# EAGLE board SparkFun_AS3935_Lightning_Detector-Panel (EAGLE 9.4.0), part 1 of 4
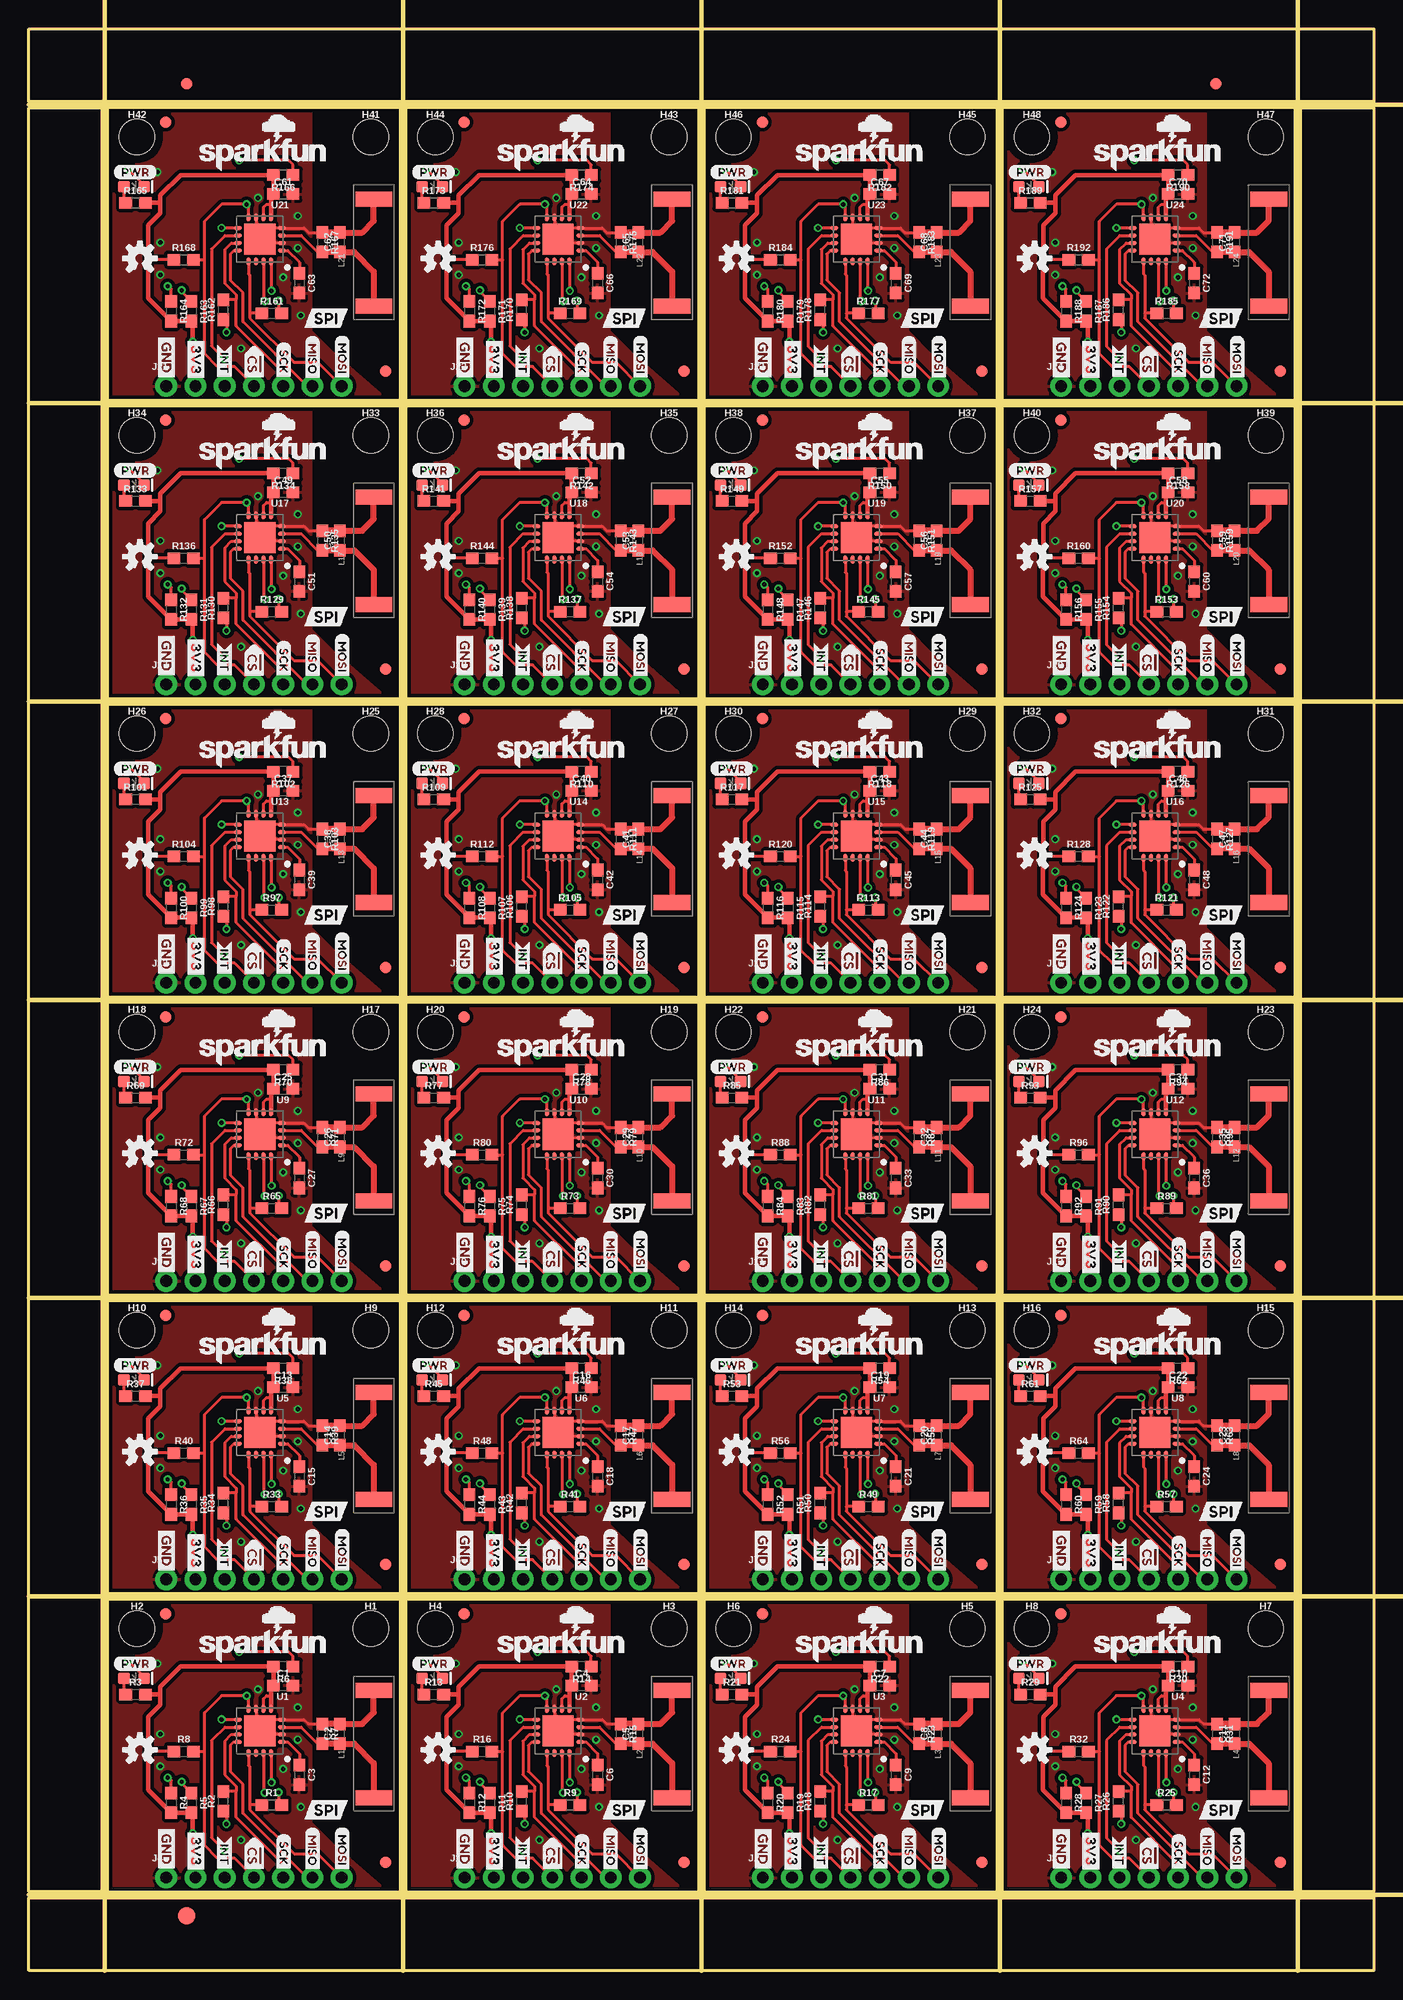
[diagram p0: board, top side]
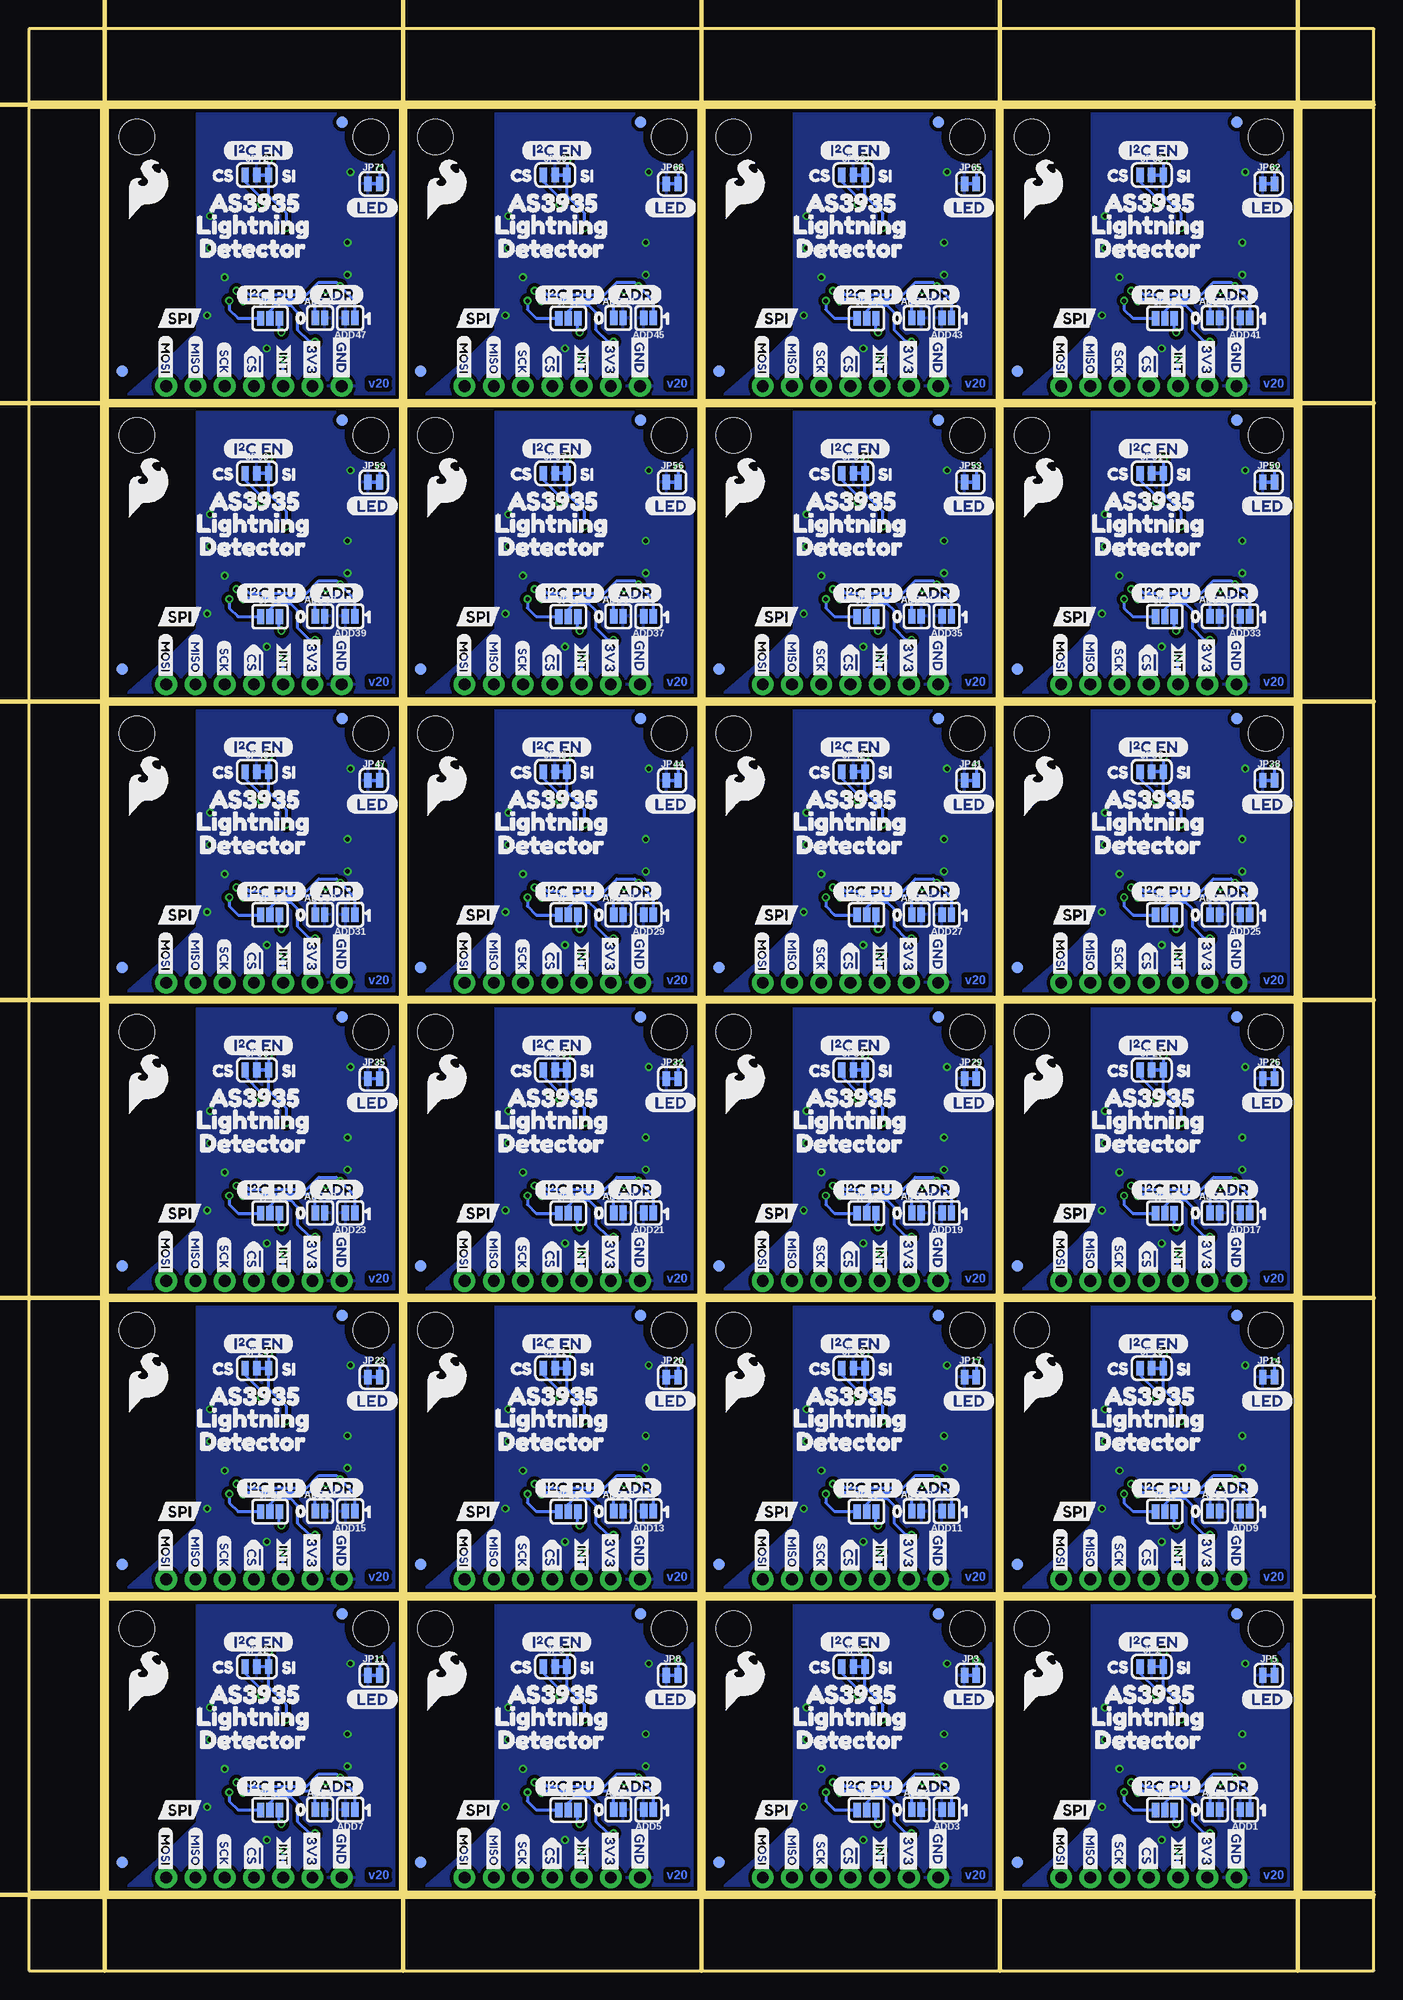
[diagram p1: board, bottom side, seen from below]

Size 116.84 x 168.66 mm. Coordinates in mm from the lower left corner, seen from the top.
Outline: 6.86,6.86 32.26,6.86 32.26,32.26 6.86,32.26 6.86,6.86
Outline: 32.77,6.86 58.17,6.86 58.17,32.26 32.77,32.26 32.77,6.86
Outline: 58.67,6.86 84.07,6.86 84.07,32.26 58.67,32.26 58.67,6.86
Outline: 84.58,6.86 109.98,6.86 109.98,32.26 84.58,32.26 84.58,6.86
Outline: 6.86,32.77 32.26,32.77 32.26,58.17 6.86,58.17 6.86,32.77
Outline: 32.77,32.77 58.17,32.77 58.17,58.17 32.77,58.17 32.77,32.77
Outline: 58.67,32.77 84.07,32.77 84.07,58.17 58.67,58.17 58.67,32.77
Outline: 84.58,32.77 109.98,32.77 109.98,58.17 84.58,58.17 84.58,32.77
Outline: 6.86,58.67 32.26,58.67 32.26,84.07 6.86,84.07 6.86,58.67
Outline: 32.77,58.67 58.17,58.67 58.17,84.07 32.77,84.07 32.77,58.67
Outline: 58.67,58.67 84.07,58.67 84.07,84.07 58.67,84.07 58.67,58.67
Outline: 84.58,58.67 109.98,58.67 109.98,84.07 84.58,84.07 84.58,58.67
Outline: 6.86,84.58 32.26,84.58 32.26,109.98 6.86,109.98 6.86,84.58
Outline: 32.77,84.58 58.17,84.58 58.17,109.98 32.77,109.98 32.77,84.58
Outline: 58.67,84.58 84.07,84.58 84.07,109.98 58.67,109.98 58.67,84.58
Outline: 84.58,84.58 109.98,84.58 109.98,109.98 84.58,109.98 84.58,84.58
Outline: 6.86,110.49 32.26,110.49 32.26,135.89 6.86,135.89 6.86,110.49
Outline: 32.77,110.49 58.17,110.49 58.17,135.89 32.77,135.89 32.77,110.49
Outline: 58.67,110.49 84.07,110.49 84.07,135.89 58.67,135.89 58.67,110.49
Outline: 84.58,110.49 109.98,110.49 109.98,135.89 84.58,135.89 84.58,110.49
Outline: 6.86,136.4 32.26,136.4 32.26,161.8 6.86,161.8 6.86,136.4
Outline: 32.77,136.4 58.17,136.4 58.17,161.8 32.77,161.8 32.77,136.4
Outline: 58.67,136.4 84.07,136.4 84.07,161.8 58.67,161.8 58.67,136.4
Outline: 84.58,136.4 109.98,136.4 109.98,161.8 84.58,161.8 84.58,136.4
Outline: 0,6.35 116.84,6.35 116.84,0 0,0 0,6.35
Outline: 110.49,161.8 116.84,161.8 116.84,6.86 110.49,6.86 110.49,161.8
Outline: 0,168.66 116.84,168.66 116.84,162.31 0,162.31 0,168.66
Outline: 0,161.8 6.35,161.8 6.35,6.86 0,6.86 0,161.8
Copper layers (1*16): Top 0.035mm / dielectric 1.5mm / Bottom 0.035mm
Design rules "SparkFun-2-layer-PCBWay-LIMIT": minimum track width 6mil, minimum drill 0.3mm, track to track 6mil, track to pad 6mil, pad to pad 6mil, via to via 6mil, smd to smd 6mil, copper to edge 6mil, drill to drill 6mil, minimum pad ring 6mil, minimum via ring 6mil, stop-mask expansion 4mil, vias tented up to drill 25mil, thermal gap 10mil
Milling: 12 lines

## Footprints (pad centres in the part's own frame; a part is rotated, then mirrored left to right if it is on the bottom)
SMT-JUMPER_2_NO_SILK = smd 0.635 x 1.27: 1 -0.406,0; 2 0.406,0
0603 = smd 1.1 x 1: 1 -0.85,0; 2 0.85,0
LED-0603 = smd 1 x 1: A -0.877,0; C 0.877,0
FIDUCIAL-1X2 = smd 1 x 1: 1 0,0
FIDUCIAL-1.5X3 = smd 1.5 x 1.5: 1 0,0
STAND-OFF-TIGHT = hole 3.048: 0,0
1X07_NO_SILK = drill 1.016 pad 1.88: 1 0,0; 2 2.54,0; 3 5.08,0; 4 7.62,0; 5 10.16,0; 6 12.7,0; 7 15.24,0
SMT-JUMPER_3_1-NC_TRACE_SILK = smd 0.635 x 1.27: 1 -1.016,0; 2 0,0; 3 1.016,0
SMT-JUMPER_3_NO_SILK = smd 0.635 x 1.27: 1 -0.813,0; 2 0,0; 3 0.813,0
SMT-JUMPER_2_NC_TRACE_SILK = smd 0.635 x 1.27: 1 -0.508,0; 2 0.508,0
MA5532-AE = smd 1.3 x 3.2: 1 -4.65,0; 2 4.65,0
16LD_MLPQ = smd 0.7 x 0.35: 1 -1.919,0.968; 2 -1.919,0.318; 3 -1.919,-0.332; 4 -1.919,-0.982; 9 1.908,-0.982; 10 1.908,-0.332; 11 1.908,0.318; 12 1.908,0.968 | smd 0.35 x 0.7: 5 -0.982,-1.917; 6 -0.332,-1.917; 7 0.318,-1.917; 8 0.968,-1.917; 13 0.968,1.907; 14 0.318,1.907; 15 -0.332,1.907; 16 -0.982,1.907 | smd 2.7 x 2.7: 17 -0.007,-0.007

## Placement (x,y rotation side)
ADD0  JUMPER-SMT_2_NO_SILK  [SMT-JUMPER_2_NO_SILK]  13.82,14 0 bottom
ADD1  JUMPER-SMT_2_NO_SILK  [SMT-JUMPER_2_NO_SILK]  11.2,14 180 bottom
ADD2  JUMPER-SMT_2_NO_SILK  [SMT-JUMPER_2_NO_SILK]  39.73,14 0 bottom
ADD3  JUMPER-SMT_2_NO_SILK  [SMT-JUMPER_2_NO_SILK]  37.11,14 180 bottom
ADD4  JUMPER-SMT_2_NO_SILK  [SMT-JUMPER_2_NO_SILK]  65.63,14 0 bottom
ADD5  JUMPER-SMT_2_NO_SILK  [SMT-JUMPER_2_NO_SILK]  63.02,14 180 bottom
ADD6  JUMPER-SMT_2_NO_SILK  [SMT-JUMPER_2_NO_SILK]  91.54,14 0 bottom
ADD7  JUMPER-SMT_2_NO_SILK  [SMT-JUMPER_2_NO_SILK]  88.93,14 180 bottom
ADD8  JUMPER-SMT_2_NO_SILK  [SMT-JUMPER_2_NO_SILK]  13.82,39.9 0 bottom
ADD9  JUMPER-SMT_2_NO_SILK  [SMT-JUMPER_2_NO_SILK]  11.2,39.9 180 bottom
ADD10  JUMPER-SMT_2_NO_SILK  [SMT-JUMPER_2_NO_SILK]  39.73,39.9 0 bottom
ADD11  JUMPER-SMT_2_NO_SILK  [SMT-JUMPER_2_NO_SILK]  37.11,39.9 180 bottom
ADD12  JUMPER-SMT_2_NO_SILK  [SMT-JUMPER_2_NO_SILK]  65.63,39.9 0 bottom
ADD13  JUMPER-SMT_2_NO_SILK  [SMT-JUMPER_2_NO_SILK]  63.02,39.9 180 bottom
ADD14  JUMPER-SMT_2_NO_SILK  [SMT-JUMPER_2_NO_SILK]  91.54,39.9 0 bottom
ADD15  JUMPER-SMT_2_NO_SILK  [SMT-JUMPER_2_NO_SILK]  88.93,39.9 180 bottom
ADD16  JUMPER-SMT_2_NO_SILK  [SMT-JUMPER_2_NO_SILK]  13.82,65.81 0 bottom
ADD17  JUMPER-SMT_2_NO_SILK  [SMT-JUMPER_2_NO_SILK]  11.2,65.81 180 bottom
ADD18  JUMPER-SMT_2_NO_SILK  [SMT-JUMPER_2_NO_SILK]  39.73,65.81 0 bottom
ADD19  JUMPER-SMT_2_NO_SILK  [SMT-JUMPER_2_NO_SILK]  37.11,65.81 180 bottom
ADD20  JUMPER-SMT_2_NO_SILK  [SMT-JUMPER_2_NO_SILK]  65.63,65.81 0 bottom
ADD21  JUMPER-SMT_2_NO_SILK  [SMT-JUMPER_2_NO_SILK]  63.02,65.81 180 bottom
ADD22  JUMPER-SMT_2_NO_SILK  [SMT-JUMPER_2_NO_SILK]  91.54,65.81 0 bottom
ADD23  JUMPER-SMT_2_NO_SILK  [SMT-JUMPER_2_NO_SILK]  88.93,65.81 180 bottom
ADD24  JUMPER-SMT_2_NO_SILK  [SMT-JUMPER_2_NO_SILK]  13.82,91.72 0 bottom
ADD25  JUMPER-SMT_2_NO_SILK  [SMT-JUMPER_2_NO_SILK]  11.2,91.72 180 bottom
ADD26  JUMPER-SMT_2_NO_SILK  [SMT-JUMPER_2_NO_SILK]  39.73,91.72 0 bottom
ADD27  JUMPER-SMT_2_NO_SILK  [SMT-JUMPER_2_NO_SILK]  37.11,91.72 180 bottom
ADD28  JUMPER-SMT_2_NO_SILK  [SMT-JUMPER_2_NO_SILK]  65.63,91.72 0 bottom
ADD29  JUMPER-SMT_2_NO_SILK  [SMT-JUMPER_2_NO_SILK]  63.02,91.72 180 bottom
ADD30  JUMPER-SMT_2_NO_SILK  [SMT-JUMPER_2_NO_SILK]  91.54,91.72 0 bottom
ADD31  JUMPER-SMT_2_NO_SILK  [SMT-JUMPER_2_NO_SILK]  88.93,91.72 180 bottom
ADD32  JUMPER-SMT_2_NO_SILK  [SMT-JUMPER_2_NO_SILK]  13.82,117.63 0 bottom
ADD33  JUMPER-SMT_2_NO_SILK  [SMT-JUMPER_2_NO_SILK]  11.2,117.63 180 bottom
ADD34  JUMPER-SMT_2_NO_SILK  [SMT-JUMPER_2_NO_SILK]  39.73,117.63 0 bottom
ADD35  JUMPER-SMT_2_NO_SILK  [SMT-JUMPER_2_NO_SILK]  37.11,117.63 180 bottom
ADD36  JUMPER-SMT_2_NO_SILK  [SMT-JUMPER_2_NO_SILK]  65.63,117.63 0 bottom
ADD37  JUMPER-SMT_2_NO_SILK  [SMT-JUMPER_2_NO_SILK]  63.02,117.63 180 bottom
ADD38  JUMPER-SMT_2_NO_SILK  [SMT-JUMPER_2_NO_SILK]  91.54,117.63 0 bottom
ADD39  JUMPER-SMT_2_NO_SILK  [SMT-JUMPER_2_NO_SILK]  88.93,117.63 180 bottom
ADD40  JUMPER-SMT_2_NO_SILK  [SMT-JUMPER_2_NO_SILK]  13.82,143.54 0 bottom
ADD41  JUMPER-SMT_2_NO_SILK  [SMT-JUMPER_2_NO_SILK]  11.2,143.54 180 bottom
ADD42  JUMPER-SMT_2_NO_SILK  [SMT-JUMPER_2_NO_SILK]  39.73,143.54 0 bottom
ADD43  JUMPER-SMT_2_NO_SILK  [SMT-JUMPER_2_NO_SILK]  37.11,143.54 180 bottom
ADD44  JUMPER-SMT_2_NO_SILK  [SMT-JUMPER_2_NO_SILK]  65.63,143.54 0 bottom
ADD45  JUMPER-SMT_2_NO_SILK  [SMT-JUMPER_2_NO_SILK]  63.02,143.54 180 bottom
ADD46  JUMPER-SMT_2_NO_SILK  [SMT-JUMPER_2_NO_SILK]  91.54,143.54 0 bottom
ADD47  JUMPER-SMT_2_NO_SILK  [SMT-JUMPER_2_NO_SILK]  88.93,143.54 180 bottom
C1  1.0uF  [0603]  22.1,24.77 0 top
C2  1nF  [0603]  27.03,20.57 90 top
C3  10uF  [0603]  23.5,17.02 270 top
C4  1.0uF  [0603]  48.01,24.77 0 top
C5  1nF  [0603]  52.93,20.57 90 top
C6  10uF  [0603]  49.4,17.02 270 top
C7  1.0uF  [0603]  73.91,24.77 0 top
C8  1nF  [0603]  78.84,20.57 90 top
C9  10uF  [0603]  75.31,17.02 270 top
C10  1.0uF  [0603]  99.82,24.77 0 top
C11  1nF  [0603]  104.75,20.57 90 top
C12  10uF  [0603]  101.22,17.02 270 top
C13  1.0uF  [0603]  22.1,50.67 0 top
C14  1nF  [0603]  27.03,46.48 90 top
C15  10uF  [0603]  23.5,42.93 270 top
C16  1.0uF  [0603]  48.01,50.67 0 top
C17  1nF  [0603]  52.93,46.48 90 top
C18  10uF  [0603]  49.4,42.93 270 top
C19  1.0uF  [0603]  73.91,50.67 0 top
C20  1nF  [0603]  78.84,46.48 90 top
C21  10uF  [0603]  75.31,42.93 270 top
C22  1.0uF  [0603]  99.82,50.67 0 top
C23  1nF  [0603]  104.75,46.48 90 top
C24  10uF  [0603]  101.22,42.93 270 top
C25  1.0uF  [0603]  22.1,76.58 0 top
C26  1nF  [0603]  27.03,72.39 90 top
C27  10uF  [0603]  23.5,68.83 270 top
C28  1.0uF  [0603]  48.01,76.58 0 top
C29  1nF  [0603]  52.93,72.39 90 top
C30  10uF  [0603]  49.4,68.83 270 top
C31  1.0uF  [0603]  73.91,76.58 0 top
C32  1nF  [0603]  78.84,72.39 90 top
C33  10uF  [0603]  75.31,68.83 270 top
C34  1.0uF  [0603]  99.82,76.58 0 top
C35  1nF  [0603]  104.75,72.39 90 top
C36  10uF  [0603]  101.22,68.83 270 top
C37  1.0uF  [0603]  22.1,102.49 0 top
C38  1nF  [0603]  27.03,98.3 90 top
C39  10uF  [0603]  23.5,94.74 270 top
C40  1.0uF  [0603]  48.01,102.49 0 top
C41  1nF  [0603]  52.93,98.3 90 top
C42  10uF  [0603]  49.4,94.74 270 top
C43  1.0uF  [0603]  73.91,102.49 0 top
C44  1nF  [0603]  78.84,98.3 90 top
C45  10uF  [0603]  75.31,94.74 270 top
C46  1.0uF  [0603]  99.82,102.49 0 top
C47  1nF  [0603]  104.75,98.3 90 top
C48  10uF  [0603]  101.22,94.74 270 top
C49  1.0uF  [0603]  22.1,128.4 0 top
C50  1nF  [0603]  27.03,124.21 90 top
C51  10uF  [0603]  23.5,120.65 270 top
C52  1.0uF  [0603]  48.01,128.4 0 top
C53  1nF  [0603]  52.93,124.21 90 top
C54  10uF  [0603]  49.4,120.65 270 top
C55  1.0uF  [0603]  73.91,128.4 0 top
C56  1nF  [0603]  78.84,124.21 90 top
C57  10uF  [0603]  75.31,120.65 270 top
C58  1.0uF  [0603]  99.82,128.4 0 top
C59  1nF  [0603]  104.75,124.21 90 top
C60  10uF  [0603]  101.22,120.65 270 top
C61  1.0uF  [0603]  22.1,154.31 0 top
C62  1nF  [0603]  27.03,150.11 90 top
C63  10uF  [0603]  23.5,146.56 270 top
C64  1.0uF  [0603]  48.01,154.31 0 top
C65  1nF  [0603]  52.93,150.11 90 top
C66  10uF  [0603]  49.4,146.56 270 top
C67  1.0uF  [0603]  73.91,154.31 0 top
C68  1nF  [0603]  78.84,150.11 90 top
C69  10uF  [0603]  75.31,146.56 270 top
C70  1.0uF  [0603]  99.82,154.31 0 top
C71  1nF  [0603]  104.75,150.11 90 top
C72  10uF  [0603]  101.22,146.56 270 top
D1  RED  [LED-0603]  9.14,25.4 0 top
D2  RED  [LED-0603]  35.05,25.4 0 top
D3  RED  [LED-0603]  60.96,25.4 0 top
D4  RED  [LED-0603]  86.87,25.4 0 top
D5  RED  [LED-0603]  9.14,51.31 0 top
D6  RED  [LED-0603]  35.05,51.31 0 top
D7  RED  [LED-0603]  60.96,51.31 0 top
D8  RED  [LED-0603]  86.87,51.31 0 top
D9  RED  [LED-0603]  9.14,77.22 0 top
D10  RED  [LED-0603]  35.05,77.22 0 top
D11  RED  [LED-0603]  60.96,77.22 0 top
D12  RED  [LED-0603]  86.87,77.22 0 top
D13  RED  [LED-0603]  9.14,103.12 0 top
D14  RED  [LED-0603]  35.05,103.12 0 top
D15  RED  [LED-0603]  60.96,103.12 0 top
D16  RED  [LED-0603]  86.87,103.12 0 top
D17  RED  [LED-0603]  9.14,129.03 0 top
D18  RED  [LED-0603]  35.05,129.03 0 top
D19  RED  [LED-0603]  60.96,129.03 0 top
D20  RED  [LED-0603]  86.87,129.03 0 top
D21  RED  [LED-0603]  9.14,154.94 0 top
D22  RED  [LED-0603]  35.05,154.94 0 top
D23  RED  [LED-0603]  60.96,154.94 0 top
D24  RED  [LED-0603]  86.87,154.94 0 top
E$1  [FIDUCIAL-1X2]  13.72,163.89 0 top
E$2  [FIDUCIAL-1X2]  103.12,163.89 0 top
E$3  [FIDUCIAL-1.5X3]  13.72,4.76 0 top
FD1  FIDUCIAL1X2  [FIDUCIAL-1X2]  11.91,31.01 0 bottom
FD2  FIDUCIAL1X2  [FIDUCIAL-1X2]  30.99,9.4 0 bottom
FD3  FIDUCIAL1X2  [FIDUCIAL-1X2]  30.99,9.4 0 top
FD4  FIDUCIAL1X2  [FIDUCIAL-1X2]  11.91,31.01 0 top
FD5  FIDUCIAL1X2  [FIDUCIAL-1X2]  37.82,31.01 0 bottom
FD6  FIDUCIAL1X2  [FIDUCIAL-1X2]  56.9,9.4 0 bottom
FD7  FIDUCIAL1X2  [FIDUCIAL-1X2]  56.9,9.4 0 top
FD8  FIDUCIAL1X2  [FIDUCIAL-1X2]  37.82,31.01 0 top
FD9  FIDUCIAL1X2  [FIDUCIAL-1X2]  63.73,31.01 0 bottom
FD10  FIDUCIAL1X2  [FIDUCIAL-1X2]  82.8,9.4 0 bottom
FD11  FIDUCIAL1X2  [FIDUCIAL-1X2]  82.8,9.4 0 top
FD12  FIDUCIAL1X2  [FIDUCIAL-1X2]  63.73,31.01 0 top
FD13  FIDUCIAL1X2  [FIDUCIAL-1X2]  89.63,31.01 0 bottom
FD14  FIDUCIAL1X2  [FIDUCIAL-1X2]  108.71,9.4 0 bottom
FD15  FIDUCIAL1X2  [FIDUCIAL-1X2]  108.71,9.4 0 top
FD16  FIDUCIAL1X2  [FIDUCIAL-1X2]  89.64,31.01 0 top
FD17  FIDUCIAL1X2  [FIDUCIAL-1X2]  11.91,56.92 0 bottom
FD18  FIDUCIAL1X2  [FIDUCIAL-1X2]  30.99,35.31 0 bottom
FD19  FIDUCIAL1X2  [FIDUCIAL-1X2]  30.99,35.31 0 top
FD20  FIDUCIAL1X2  [FIDUCIAL-1X2]  11.91,56.92 0 top
FD21  FIDUCIAL1X2  [FIDUCIAL-1X2]  37.82,56.92 0 bottom
FD22  FIDUCIAL1X2  [FIDUCIAL-1X2]  56.9,35.31 0 bottom
FD23  FIDUCIAL1X2  [FIDUCIAL-1X2]  56.9,35.31 0 top
FD24  FIDUCIAL1X2  [FIDUCIAL-1X2]  37.82,56.92 0 top
FD25  FIDUCIAL1X2  [FIDUCIAL-1X2]  63.73,56.92 0 bottom
FD26  FIDUCIAL1X2  [FIDUCIAL-1X2]  82.8,35.31 0 bottom
FD27  FIDUCIAL1X2  [FIDUCIAL-1X2]  82.8,35.31 0 top
FD28  FIDUCIAL1X2  [FIDUCIAL-1X2]  63.73,56.92 0 top
FD29  FIDUCIAL1X2  [FIDUCIAL-1X2]  89.63,56.92 0 bottom
FD30  FIDUCIAL1X2  [FIDUCIAL-1X2]  108.71,35.31 0 bottom
FD31  FIDUCIAL1X2  [FIDUCIAL-1X2]  108.71,35.31 0 top
FD32  FIDUCIAL1X2  [FIDUCIAL-1X2]  89.64,56.92 0 top
FD33  FIDUCIAL1X2  [FIDUCIAL-1X2]  11.91,82.83 0 bottom
FD34  FIDUCIAL1X2  [FIDUCIAL-1X2]  30.99,61.21 0 bottom
FD35  FIDUCIAL1X2  [FIDUCIAL-1X2]  30.99,61.21 0 top
FD36  FIDUCIAL1X2  [FIDUCIAL-1X2]  11.91,82.83 0 top
FD37  FIDUCIAL1X2  [FIDUCIAL-1X2]  37.82,82.83 0 bottom
FD38  FIDUCIAL1X2  [FIDUCIAL-1X2]  56.9,61.21 0 bottom
FD39  FIDUCIAL1X2  [FIDUCIAL-1X2]  56.9,61.21 0 top
FD40  FIDUCIAL1X2  [FIDUCIAL-1X2]  37.82,82.83 0 top
FD41  FIDUCIAL1X2  [FIDUCIAL-1X2]  63.73,82.83 0 bottom
FD42  FIDUCIAL1X2  [FIDUCIAL-1X2]  82.8,61.21 0 bottom
FD43  FIDUCIAL1X2  [FIDUCIAL-1X2]  82.8,61.21 0 top
FD44  FIDUCIAL1X2  [FIDUCIAL-1X2]  63.73,82.83 0 top
FD45  FIDUCIAL1X2  [FIDUCIAL-1X2]  89.63,82.83 0 bottom
FD46  FIDUCIAL1X2  [FIDUCIAL-1X2]  108.71,61.21 0 bottom
FD47  FIDUCIAL1X2  [FIDUCIAL-1X2]  108.71,61.21 0 top
FD48  FIDUCIAL1X2  [FIDUCIAL-1X2]  89.64,82.83 0 top
FD49  FIDUCIAL1X2  [FIDUCIAL-1X2]  11.91,108.74 0 bottom
FD50  FIDUCIAL1X2  [FIDUCIAL-1X2]  30.99,87.12 0 bottom
FD51  FIDUCIAL1X2  [FIDUCIAL-1X2]  30.99,87.12 0 top
FD52  FIDUCIAL1X2  [FIDUCIAL-1X2]  11.91,108.74 0 top
FD53  FIDUCIAL1X2  [FIDUCIAL-1X2]  37.82,108.74 0 bottom
FD54  FIDUCIAL1X2  [FIDUCIAL-1X2]  56.9,87.12 0 bottom
FD55  FIDUCIAL1X2  [FIDUCIAL-1X2]  56.9,87.12 0 top
FD56  FIDUCIAL1X2  [FIDUCIAL-1X2]  37.82,108.74 0 top
FD57  FIDUCIAL1X2  [FIDUCIAL-1X2]  63.73,108.74 0 bottom
FD58  FIDUCIAL1X2  [FIDUCIAL-1X2]  82.8,87.12 0 bottom
FD59  FIDUCIAL1X2  [FIDUCIAL-1X2]  82.8,87.12 0 top
FD60  FIDUCIAL1X2  [FIDUCIAL-1X2]  63.73,108.74 0 top
FD61  FIDUCIAL1X2  [FIDUCIAL-1X2]  89.63,108.74 0 bottom
FD62  FIDUCIAL1X2  [FIDUCIAL-1X2]  108.71,87.12 0 bottom
FD63  FIDUCIAL1X2  [FIDUCIAL-1X2]  108.71,87.12 0 top
FD64  FIDUCIAL1X2  [FIDUCIAL-1X2]  89.64,108.74 0 top
FD65  FIDUCIAL1X2  [FIDUCIAL-1X2]  11.91,134.65 0 bottom
FD66  FIDUCIAL1X2  [FIDUCIAL-1X2]  30.99,113.03 0 bottom
FD67  FIDUCIAL1X2  [FIDUCIAL-1X2]  30.99,113.03 0 top
FD68  FIDUCIAL1X2  [FIDUCIAL-1X2]  11.91,134.65 0 top
FD69  FIDUCIAL1X2  [FIDUCIAL-1X2]  37.82,134.65 0 bottom
FD70  FIDUCIAL1X2  [FIDUCIAL-1X2]  56.9,113.03 0 bottom
FD71  FIDUCIAL1X2  [FIDUCIAL-1X2]  56.9,113.03 0 top
FD72  FIDUCIAL1X2  [FIDUCIAL-1X2]  37.82,134.65 0 top
FD73  FIDUCIAL1X2  [FIDUCIAL-1X2]  63.73,134.65 0 bottom
FD74  FIDUCIAL1X2  [FIDUCIAL-1X2]  82.8,113.03 0 bottom
FD75  FIDUCIAL1X2  [FIDUCIAL-1X2]  82.8,113.03 0 top
FD76  FIDUCIAL1X2  [FIDUCIAL-1X2]  63.73,134.65 0 top
FD77  FIDUCIAL1X2  [FIDUCIAL-1X2]  89.63,134.65 0 bottom
FD78  FIDUCIAL1X2  [FIDUCIAL-1X2]  108.71,113.03 0 bottom
FD79  FIDUCIAL1X2  [FIDUCIAL-1X2]  108.71,113.03 0 top
FD80  FIDUCIAL1X2  [FIDUCIAL-1X2]  89.64,134.65 0 top
FD81  FIDUCIAL1X2  [FIDUCIAL-1X2]  11.91,160.55 0 bottom
FD82  FIDUCIAL1X2  [FIDUCIAL-1X2]  30.99,138.94 0 bottom
FD83  FIDUCIAL1X2  [FIDUCIAL-1X2]  30.99,138.94 0 top
FD84  FIDUCIAL1X2  [FIDUCIAL-1X2]  11.91,160.55 0 top
FD85  FIDUCIAL1X2  [FIDUCIAL-1X2]  37.82,160.55 0 bottom
FD86  FIDUCIAL1X2  [FIDUCIAL-1X2]  56.9,138.94 0 bottom
FD87  FIDUCIAL1X2  [FIDUCIAL-1X2]  56.9,138.94 0 top
FD88  FIDUCIAL1X2  [FIDUCIAL-1X2]  37.82,160.55 0 top
FD89  FIDUCIAL1X2  [FIDUCIAL-1X2]  63.73,160.55 0 bottom
FD90  FIDUCIAL1X2  [FIDUCIAL-1X2]  82.8,138.94 0 bottom
FD91  FIDUCIAL1X2  [FIDUCIAL-1X2]  82.8,138.94 0 top
FD92  FIDUCIAL1X2  [FIDUCIAL-1X2]  63.73,160.55 0 top
FD93  FIDUCIAL1X2  [FIDUCIAL-1X2]  89.63,160.55 0 bottom
FD94  FIDUCIAL1X2  [FIDUCIAL-1X2]  108.71,138.94 0 bottom
FD95  FIDUCIAL1X2  [FIDUCIAL-1X2]  108.71,138.94 0 top
FD96  FIDUCIAL1X2  [FIDUCIAL-1X2]  89.64,160.55 0 top
H1  STAND-OFFTIGHT  [STAND-OFF-TIGHT]  29.72,29.72 0 top
H2  STAND-OFFTIGHT  [STAND-OFF-TIGHT]  9.4,29.72 0 top
H3  STAND-OFFTIGHT  [STAND-OFF-TIGHT]  55.63,29.72 0 top
H4  STAND-OFFTIGHT  [STAND-OFF-TIGHT]  35.31,29.72 0 top
H5  STAND-OFFTIGHT  [STAND-OFF-TIGHT]  81.53,29.72 0 top
H6  STAND-OFFTIGHT  [STAND-OFF-TIGHT]  61.21,29.72 0 top
H7  STAND-OFFTIGHT  [STAND-OFF-TIGHT]  107.44,29.72 0 top
H8  STAND-OFFTIGHT  [STAND-OFF-TIGHT]  87.12,29.72 0 top
H9  STAND-OFFTIGHT  [STAND-OFF-TIGHT]  29.72,55.63 0 top
H10  STAND-OFFTIGHT  [STAND-OFF-TIGHT]  9.4,55.63 0 top
H11  STAND-OFFTIGHT  [STAND-OFF-TIGHT]  55.63,55.63 0 top
H12  STAND-OFFTIGHT  [STAND-OFF-TIGHT]  35.31,55.63 0 top
H13  STAND-OFFTIGHT  [STAND-OFF-TIGHT]  81.53,55.63 0 top
H14  STAND-OFFTIGHT  [STAND-OFF-TIGHT]  61.21,55.63 0 top
H15  STAND-OFFTIGHT  [STAND-OFF-TIGHT]  107.44,55.63 0 top
H16  STAND-OFFTIGHT  [STAND-OFF-TIGHT]  87.12,55.63 0 top
H17  STAND-OFFTIGHT  [STAND-OFF-TIGHT]  29.72,81.53 0 top
H18  STAND-OFFTIGHT  [STAND-OFF-TIGHT]  9.4,81.53 0 top
H19  STAND-OFFTIGHT  [STAND-OFF-TIGHT]  55.63,81.53 0 top
H20  STAND-OFFTIGHT  [STAND-OFF-TIGHT]  35.31,81.53 0 top
H21  STAND-OFFTIGHT  [STAND-OFF-TIGHT]  81.53,81.53 0 top
H22  STAND-OFFTIGHT  [STAND-OFF-TIGHT]  61.21,81.53 0 top
H23  STAND-OFFTIGHT  [STAND-OFF-TIGHT]  107.44,81.53 0 top
H24  STAND-OFFTIGHT  [STAND-OFF-TIGHT]  87.12,81.53 0 top
H25  STAND-OFFTIGHT  [STAND-OFF-TIGHT]  29.72,107.44 0 top
H26  STAND-OFFTIGHT  [STAND-OFF-TIGHT]  9.4,107.44 0 top
H27  STAND-OFFTIGHT  [STAND-OFF-TIGHT]  55.63,107.44 0 top
H28  STAND-OFFTIGHT  [STAND-OFF-TIGHT]  35.31,107.44 0 top
H29  STAND-OFFTIGHT  [STAND-OFF-TIGHT]  81.53,107.44 0 top
H30  STAND-OFFTIGHT  [STAND-OFF-TIGHT]  61.21,107.44 0 top
H31  STAND-OFFTIGHT  [STAND-OFF-TIGHT]  107.44,107.44 0 top
H32  STAND-OFFTIGHT  [STAND-OFF-TIGHT]  87.12,107.44 0 top
H33  STAND-OFFTIGHT  [STAND-OFF-TIGHT]  29.72,133.35 0 top
H34  STAND-OFFTIGHT  [STAND-OFF-TIGHT]  9.4,133.35 0 top
H35  STAND-OFFTIGHT  [STAND-OFF-TIGHT]  55.63,133.35 0 top
H36  STAND-OFFTIGHT  [STAND-OFF-TIGHT]  35.31,133.35 0 top
H37  STAND-OFFTIGHT  [STAND-OFF-TIGHT]  81.53,133.35 0 top
H38  STAND-OFFTIGHT  [STAND-OFF-TIGHT]  61.21,133.35 0 top
H39  STAND-OFFTIGHT  [STAND-OFF-TIGHT]  107.44,133.35 0 top
H40  STAND-OFFTIGHT  [STAND-OFF-TIGHT]  87.12,133.35 0 top
H41  STAND-OFFTIGHT  [STAND-OFF-TIGHT]  29.72,159.26 0 top
H42  STAND-OFFTIGHT  [STAND-OFF-TIGHT]  9.4,159.26 0 top
H43  STAND-OFFTIGHT  [STAND-OFF-TIGHT]  55.63,159.26 0 top
H44  STAND-OFFTIGHT  [STAND-OFF-TIGHT]  35.31,159.26 0 top
H45  STAND-OFFTIGHT  [STAND-OFF-TIGHT]  81.53,159.26 0 top
H46  STAND-OFFTIGHT  [STAND-OFF-TIGHT]  61.21,159.26 0 top
H47  STAND-OFFTIGHT  [STAND-OFF-TIGHT]  107.44,159.26 0 top
H48  STAND-OFFTIGHT  [STAND-OFF-TIGHT]  87.12,159.26 0 top
J1  [1X07_NO_SILK]  37.85,8.09 0 top
J2  [1X07_NO_SILK]  63.75,8.09 0 top
J3  [1X07_NO_SILK]  89.66,8.09 0 top
J4  [1X07_NO_SILK]  11.94,8.09 0 top
J5  [1X07_NO_SILK]  11.94,34 0 top
J6  [1X07_NO_SILK]  37.85,34 0 top
J7  [1X07_NO_SILK]  63.75,34 0 top
J8  [1X07_NO_SILK]  89.66,34 0 top
J9  [1X07_NO_SILK]  11.94,59.9 0 top
J10  [1X07_NO_SILK]  37.85,59.9 0 top
J11  [1X07_NO_SILK]  63.75,59.9 0 top
J12  [1X07_NO_SILK]  89.66,59.9 0 top
J13  [1X07_NO_SILK]  11.94,85.81 0 top
J14  [1X07_NO_SILK]  37.85,85.81 0 top
J15  [1X07_NO_SILK]  63.75,85.81 0 top
J16  [1X07_NO_SILK]  89.66,85.81 0 top
J17  [1X07_NO_SILK]  11.94,111.72 0 top
J18  [1X07_NO_SILK]  37.85,111.72 0 top
J19  [1X07_NO_SILK]  63.75,111.72 0 top
J20  [1X07_NO_SILK]  89.66,111.72 0 top
J21  [1X07_NO_SILK]  11.94,137.63 0 top
J22  [1X07_NO_SILK]  37.85,137.63 0 top
J23  [1X07_NO_SILK]  63.75,137.63 0 top
J24  [1X07_NO_SILK]  89.66,137.63 0 top
JP1  I2C_EN  [SMT-JUMPER_3_1-NC_TRACE_SILK]  19.3,26.42 0 bottom
JP2  JUMPER-SMT_3_NO_SILK  [SMT-JUMPER_3_NO_SILK]  44.07,13.97 0 bottom
JP3  LED  [SMT-JUMPER_2_NC_TRACE_SILK]  35.05,25.65 0 bottom
JP4  JUMPER-SMT_3_NO_SILK  [SMT-JUMPER_3_NO_SILK]  18.16,13.97 0 bottom
JP5  LED  [SMT-JUMPER_2_NC_TRACE_SILK]  9.14,25.65 0 bottom
JP6  I2C_EN  [SMT-JUMPER_3_1-NC_TRACE_SILK]  45.21,26.42 0 bottom
JP7  JUMPER-SMT_3_NO_SILK  [SMT-JUMPER_3_NO_SILK]  69.98,13.97 0 bottom
JP8  LED  [SMT-JUMPER_2_NC_TRACE_SILK]  60.96,25.65 0 bottom
JP9  I2C_EN  [SMT-JUMPER_3_1-NC_TRACE_SILK]  71.12,26.42 0 bottom
JP10  JUMPER-SMT_3_NO_SILK  [SMT-JUMPER_3_NO_SILK]  95.89,13.97 0 bottom
JP11  LED  [SMT-JUMPER_2_NC_TRACE_SILK]  86.87,25.65 0 bottom
JP12  I2C_EN  [SMT-JUMPER_3_1-NC_TRACE_SILK]  97.03,26.42 0 bottom
JP13  JUMPER-SMT_3_NO_SILK  [SMT-JUMPER_3_NO_SILK]  18.16,39.88 0 bottom
JP14  LED  [SMT-JUMPER_2_NC_TRACE_SILK]  9.14,51.56 0 bottom
JP15  I2C_EN  [SMT-JUMPER_3_1-NC_TRACE_SILK]  19.3,52.32 0 bottom
JP16  JUMPER-SMT_3_NO_SILK  [SMT-JUMPER_3_NO_SILK]  44.07,39.88 0 bottom
JP17  LED  [SMT-JUMPER_2_NC_TRACE_SILK]  35.05,51.56 0 bottom
JP18  I2C_EN  [SMT-JUMPER_3_1-NC_TRACE_SILK]  45.21,52.32 0 bottom
JP19  JUMPER-SMT_3_NO_SILK  [SMT-JUMPER_3_NO_SILK]  69.98,39.88 0 bottom
JP20  LED  [SMT-JUMPER_2_NC_TRACE_SILK]  60.96,51.56 0 bottom
JP21  I2C_EN  [SMT-JUMPER_3_1-NC_TRACE_SILK]  71.12,52.32 0 bottom
JP22  JUMPER-SMT_3_NO_SILK  [SMT-JUMPER_3_NO_SILK]  95.89,39.88 0 bottom
JP23  LED  [SMT-JUMPER_2_NC_TRACE_SILK]  86.87,51.56 0 bottom
JP24  I2C_EN  [SMT-JUMPER_3_1-NC_TRACE_SILK]  97.03,52.32 0 bottom
JP25  JUMPER-SMT_3_NO_SILK  [SMT-JUMPER_3_NO_SILK]  18.16,65.79 0 bottom
JP26  LED  [SMT-JUMPER_2_NC_TRACE_SILK]  9.14,77.47 0 bottom
JP27  I2C_EN  [SMT-JUMPER_3_1-NC_TRACE_SILK]  19.3,78.23 0 bottom
JP28  JUMPER-SMT_3_NO_SILK  [SMT-JUMPER_3_NO_SILK]  44.07,65.79 0 bottom
JP29  LED  [SMT-JUMPER_2_NC_TRACE_SILK]  35.05,77.47 0 bottom
JP30  I2C_EN  [SMT-JUMPER_3_1-NC_TRACE_SILK]  45.21,78.23 0 bottom
JP31  JUMPER-SMT_3_NO_SILK  [SMT-JUMPER_3_NO_SILK]  69.98,65.79 0 bottom
JP32  LED  [SMT-JUMPER_2_NC_TRACE_SILK]  60.96,77.47 0 bottom
JP33  I2C_EN  [SMT-JUMPER_3_1-NC_TRACE_SILK]  71.12,78.23 0 bottom
JP34  JUMPER-SMT_3_NO_SILK  [SMT-JUMPER_3_NO_SILK]  95.89,65.79 0 bottom
JP35  LED  [SMT-JUMPER_2_NC_TRACE_SILK]  86.87,77.47 0 bottom
JP36  I2C_EN  [SMT-JUMPER_3_1-NC_TRACE_SILK]  97.03,78.23 0 bottom
JP37  JUMPER-SMT_3_NO_SILK  [SMT-JUMPER_3_NO_SILK]  18.16,91.69 0 bottom
JP38  LED  [SMT-JUMPER_2_NC_TRACE_SILK]  9.14,103.38 0 bottom
JP39  I2C_EN  [SMT-JUMPER_3_1-NC_TRACE_SILK]  19.3,104.14 0 bottom
JP40  JUMPER-SMT_3_NO_SILK  [SMT-JUMPER_3_NO_SILK]  44.07,91.69 0 bottom
JP41  LED  [SMT-JUMPER_2_NC_TRACE_SILK]  35.05,103.38 0 bottom
JP42  I2C_EN  [SMT-JUMPER_3_1-NC_TRACE_SILK]  45.21,104.14 0 bottom
JP43  JUMPER-SMT_3_NO_SILK  [SMT-JUMPER_3_NO_SILK]  69.98,91.69 0 bottom
JP44  LED  [SMT-JUMPER_2_NC_TRACE_SILK]  60.96,103.38 0 bottom
JP45  I2C_EN  [SMT-JUMPER_3_1-NC_TRACE_SILK]  71.12,104.14 0 bottom
JP46  JUMPER-SMT_3_NO_SILK  [SMT-JUMPER_3_NO_SILK]  95.89,91.69 0 bottom
JP47  LED  [SMT-JUMPER_2_NC_TRACE_SILK]  86.87,103.38 0 bottom
JP48  I2C_EN  [SMT-JUMPER_3_1-NC_TRACE_SILK]  97.03,104.14 0 bottom
JP49  JUMPER-SMT_3_NO_SILK  [SMT-JUMPER_3_NO_SILK]  18.16,117.6 0 bottom
JP50  LED  [SMT-JUMPER_2_NC_TRACE_SILK]  9.14,129.29 0 bottom
JP51  I2C_EN  [SMT-JUMPER_3_1-NC_TRACE_SILK]  19.3,130.05 0 bottom
JP52  JUMPER-SMT_3_NO_SILK  [SMT-JUMPER_3_NO_SILK]  44.07,117.6 0 bottom
JP53  LED  [SMT-JUMPER_2_NC_TRACE_SILK]  35.05,129.29 0 bottom
JP54  I2C_EN  [SMT-JUMPER_3_1-NC_TRACE_SILK]  45.21,130.05 0 bottom
JP55  JUMPER-SMT_3_NO_SILK  [SMT-JUMPER_3_NO_SILK]  69.98,117.6 0 bottom
JP56  LED  [SMT-JUMPER_2_NC_TRACE_SILK]  60.96,129.29 0 bottom
JP57  I2C_EN  [SMT-JUMPER_3_1-NC_TRACE_SILK]  71.12,130.05 0 bottom
JP58  JUMPER-SMT_3_NO_SILK  [SMT-JUMPER_3_NO_SILK]  95.89,117.6 0 bottom
JP59  LED  [SMT-JUMPER_2_NC_TRACE_SILK]  86.87,129.29 0 bottom
JP60  I2C_EN  [SMT-JUMPER_3_1-NC_TRACE_SILK]  97.03,130.05 0 bottom
JP61  JUMPER-SMT_3_NO_SILK  [SMT-JUMPER_3_NO_SILK]  18.16,143.51 0 bottom
JP62  LED  [SMT-JUMPER_2_NC_TRACE_SILK]  9.14,155.19 0 bottom
JP63  I2C_EN  [SMT-JUMPER_3_1-NC_TRACE_SILK]  19.3,155.96 0 bottom
JP64  JUMPER-SMT_3_NO_SILK  [SMT-JUMPER_3_NO_SILK]  44.07,143.51 0 bottom
JP65  LED  [SMT-JUMPER_2_NC_TRACE_SILK]  35.05,155.19 0 bottom
JP66  I2C_EN  [SMT-JUMPER_3_1-NC_TRACE_SILK]  45.21,155.96 0 bottom
JP67  JUMPER-SMT_3_NO_SILK  [SMT-JUMPER_3_NO_SILK]  69.98,143.51 0 bottom
JP68  LED  [SMT-JUMPER_2_NC_TRACE_SILK]  60.96,155.19 0 bottom
JP69  I2C_EN  [SMT-JUMPER_3_1-NC_TRACE_SILK]  71.12,155.96 0 bottom
JP70  JUMPER-SMT_3_NO_SILK  [SMT-JUMPER_3_NO_SILK]  95.89,143.51 0 bottom
JP71  LED  [SMT-JUMPER_2_NC_TRACE_SILK]  86.87,155.19 0 bottom
JP72  I2C_EN  [SMT-JUMPER_3_1-NC_TRACE_SILK]  97.03,155.96 0 bottom
L1  100uH  [MA5532-AE]  29.97,19.68 90 top
L2  100uH  [MA5532-AE]  55.88,19.68 90 top
L3  100uH  [MA5532-AE]  81.79,19.68 90 top
L4  100uH  [MA5532-AE]  107.7,19.68 90 top
L5  100uH  [MA5532-AE]  29.97,45.59 90 top
L6  100uH  [MA5532-AE]  55.88,45.59 90 top
L7  100uH  [MA5532-AE]  81.79,45.59 90 top
L8  100uH  [MA5532-AE]  107.7,45.59 90 top
L9  100uH  [MA5532-AE]  29.97,71.5 90 top
L10  100uH  [MA5532-AE]  55.88,71.5 90 top
L11  100uH  [MA5532-AE]  81.79,71.5 90 top
L12  100uH  [MA5532-AE]  107.7,71.5 90 top
L13  100uH  [MA5532-AE]  29.97,97.41 90 top
L14  100uH  [MA5532-AE]  55.88,97.41 90 top
L15  100uH  [MA5532-AE]  81.79,97.41 90 top
L16  100uH  [MA5532-AE]  107.7,97.41 90 top
L17  100uH  [MA5532-AE]  29.97,123.32 90 top
L18  100uH  [MA5532-AE]  55.88,123.32 90 top
L19  100uH  [MA5532-AE]  81.79,123.32 90 top
L20  100uH  [MA5532-AE]  107.7,123.32 90 top
L21  100uH  [MA5532-AE]  29.97,149.22 90 top
L22  100uH  [MA5532-AE]  55.88,149.22 90 top
L23  100uH  [MA5532-AE]  81.79,149.22 90 top
L24  100uH  [MA5532-AE]  107.7,149.22 90 top
LOGO1  OSHW-LOGOS  [OSHW-LOGO-S]  9.65,19.18 0 top
LOGO2  SFE_LOGO_NAME.1_INCH  [SFE_LOGO_NAME_.1]  20.32,28.19 0 top
LOGO3  SFE_LOGO_FLAME.2_INCH  [SFE_LOGO_FLAME_.2]  28.7,25.15 0 bottom
LOGO4  OSHW-LOGOS  [OSHW-LOGO-S]  35.56,19.18 0 top
LOGO5  SFE_LOGO_NAME.1_INCH  [SFE_LOGO_NAME_.1]  46.23,28.19 0 top
LOGO6  SFE_LOGO_FLAME.2_INCH  [SFE_LOGO_FLAME_.2]  54.61,25.15 0 bottom
LOGO7  OSHW-LOGOS  [OSHW-LOGO-S]  61.47,19.18 0 top
LOGO8  SFE_LOGO_NAME.1_INCH  [SFE_LOGO_NAME_.1]  72.14,28.19 0 top
LOGO9  SFE_LOGO_FLAME.2_INCH  [SFE_LOGO_FLAME_.2]  80.52,25.15 0 bottom
LOGO10  OSHW-LOGOS  [OSHW-LOGO-S]  87.38,19.18 0 top
LOGO11  SFE_LOGO_NAME.1_INCH  [SFE_LOGO_NAME_.1]  98.04,28.19 0 top
LOGO12  SFE_LOGO_FLAME.2_INCH  [SFE_LOGO_FLAME_.2]  106.43,25.15 0 bottom
LOGO13  OSHW-LOGOS  [OSHW-LOGO-S]  9.65,45.08 0 top
LOGO14  SFE_LOGO_NAME.1_INCH  [SFE_LOGO_NAME_.1]  20.32,54.1 0 top
LOGO15  SFE_LOGO_FLAME.2_INCH  [SFE_LOGO_FLAME_.2]  28.7,51.05 0 bottom
LOGO16  OSHW-LOGOS  [OSHW-LOGO-S]  35.56,45.08 0 top
LOGO17  SFE_LOGO_NAME.1_INCH  [SFE_LOGO_NAME_.1]  46.23,54.1 0 top
LOGO18  SFE_LOGO_FLAME.2_INCH  [SFE_LOGO_FLAME_.2]  54.61,51.05 0 bottom
LOGO19  OSHW-LOGOS  [OSHW-LOGO-S]  61.47,45.08 0 top
LOGO20  SFE_LOGO_NAME.1_INCH  [SFE_LOGO_NAME_.1]  72.14,54.1 0 top
LOGO21  SFE_LOGO_FLAME.2_INCH  [SFE_LOGO_FLAME_.2]  80.52,51.05 0 bottom
LOGO22  OSHW-LOGOS  [OSHW-LOGO-S]  87.38,45.08 0 top
LOGO23  SFE_LOGO_NAME.1_INCH  [SFE_LOGO_NAME_.1]  98.04,54.1 0 top
LOGO24  SFE_LOGO_FLAME.2_INCH  [SFE_LOGO_FLAME_.2]  106.43,51.05 0 bottom
LOGO25  OSHW-LOGOS  [OSHW-LOGO-S]  9.65,70.99 0 top
LOGO26  SFE_LOGO_NAME.1_INCH  [SFE_LOGO_NAME_.1]  20.32,80.01 0 top
LOGO27  SFE_LOGO_FLAME.2_INCH  [SFE_LOGO_FLAME_.2]  28.7,76.96 0 bottom
LOGO28  OSHW-LOGOS  [OSHW-LOGO-S]  35.56,70.99 0 top
LOGO29  SFE_LOGO_NAME.1_INCH  [SFE_LOGO_NAME_.1]  46.23,80.01 0 top
LOGO30  SFE_LOGO_FLAME.2_INCH  [SFE_LOGO_FLAME_.2]  54.61,76.96 0 bottom
LOGO31  OSHW-LOGOS  [OSHW-LOGO-S]  61.47,70.99 0 top
LOGO32  SFE_LOGO_NAME.1_INCH  [SFE_LOGO_NAME_.1]  72.14,80.01 0 top
LOGO33  SFE_LOGO_FLAME.2_INCH  [SFE_LOGO_FLAME_.2]  80.52,76.96 0 bottom
LOGO34  OSHW-LOGOS  [OSHW-LOGO-S]  87.38,70.99 0 top
LOGO35  SFE_LOGO_NAME.1_INCH  [SFE_LOGO_NAME_.1]  98.04,80.01 0 top
LOGO36  SFE_LOGO_FLAME.2_INCH  [SFE_LOGO_FLAME_.2]  106.43,76.96 0 bottom
LOGO37  OSHW-LOGOS  [OSHW-LOGO-S]  9.65,96.9 0 top
LOGO38  SFE_LOGO_NAME.1_INCH  [SFE_LOGO_NAME_.1]  20.32,105.92 0 top
LOGO39  SFE_LOGO_FLAME.2_INCH  [SFE_LOGO_FLAME_.2]  28.7,102.87 0 bottom
LOGO40  OSHW-LOGOS  [OSHW-LOGO-S]  35.56,96.9 0 top
LOGO41  SFE_LOGO_NAME.1_INCH  [SFE_LOGO_NAME_.1]  46.23,105.92 0 top
LOGO42  SFE_LOGO_FLAME.2_INCH  [SFE_LOGO_FLAME_.2]  54.61,102.87 0 bottom
LOGO43  OSHW-LOGOS  [OSHW-LOGO-S]  61.47,96.9 0 top
LOGO44  SFE_LOGO_NAME.1_INCH  [SFE_LOGO_NAME_.1]  72.14,105.92 0 top
LOGO45  SFE_LOGO_FLAME.2_INCH  [SFE_LOGO_FLAME_.2]  80.52,102.87 0 bottom
LOGO46  OSHW-LOGOS  [OSHW-LOGO-S]  87.38,96.9 0 top
LOGO47  SFE_LOGO_NAME.1_INCH  [SFE_LOGO_NAME_.1]  98.04,105.92 0 top
LOGO48  SFE_LOGO_FLAME.2_INCH  [SFE_LOGO_FLAME_.2]  106.43,102.87 0 bottom
LOGO49  OSHW-LOGOS  [OSHW-LOGO-S]  9.65,122.81 0 top
LOGO50  SFE_LOGO_NAME.1_INCH  [SFE_LOGO_NAME_.1]  20.32,131.83 0 top
LOGO51  SFE_LOGO_FLAME.2_INCH  [SFE_LOGO_FLAME_.2]  28.7,128.78 0 bottom
LOGO52  OSHW-LOGOS  [OSHW-LOGO-S]  35.56,122.81 0 top
LOGO53  SFE_LOGO_NAME.1_INCH  [SFE_LOGO_NAME_.1]  46.23,131.83 0 top
LOGO54  SFE_LOGO_FLAME.2_INCH  [SFE_LOGO_FLAME_.2]  54.61,128.78 0 bottom
LOGO55  OSHW-LOGOS  [OSHW-LOGO-S]  61.47,122.81 0 top
LOGO56  SFE_LOGO_NAME.1_INCH  [SFE_LOGO_NAME_.1]  72.14,131.83 0 top
LOGO57  SFE_LOGO_FLAME.2_INCH  [SFE_LOGO_FLAME_.2]  80.52,128.78 0 bottom
LOGO58  OSHW-LOGOS  [OSHW-LOGO-S]  87.38,122.81 0 top
LOGO59  SFE_LOGO_NAME.1_INCH  [SFE_LOGO_NAME_.1]  98.04,131.83 0 top
LOGO60  SFE_LOGO_FLAME.2_INCH  [SFE_LOGO_FLAME_.2]  106.43,128.78 0 bottom
LOGO61  OSHW-LOGOS  [OSHW-LOGO-S]  9.65,148.72 0 top
LOGO62  SFE_LOGO_NAME.1_INCH  [SFE_LOGO_NAME_.1]  20.32,157.73 0 top
LOGO63  SFE_LOGO_FLAME.2_INCH  [SFE_LOGO_FLAME_.2]  28.7,154.69 0 bottom
LOGO64  OSHW-LOGOS  [OSHW-LOGO-S]  35.56,148.72 0 top
LOGO65  SFE_LOGO_NAME.1_INCH  [SFE_LOGO_NAME_.1]  46.23,157.73 0 top
LOGO66  SFE_LOGO_FLAME.2_INCH  [SFE_LOGO_FLAME_.2]  54.61,154.69 0 bottom
LOGO67  OSHW-LOGOS  [OSHW-LOGO-S]  61.47,148.72 0 top
LOGO68  SFE_LOGO_NAME.1_INCH  [SFE_LOGO_NAME_.1]  72.14,157.73 0 top
LOGO69  SFE_LOGO_FLAME.2_INCH  [SFE_LOGO_FLAME_.2]  80.52,154.69 0 bottom
LOGO70  OSHW-LOGOS  [OSHW-LOGO-S]  87.38,148.72 0 top
LOGO71  SFE_LOGO_NAME.1_INCH  [SFE_LOGO_NAME_.1]  98.04,157.73 0 top
LOGO72  SFE_LOGO_FLAME.2_INCH  [SFE_LOGO_FLAME_.2]  106.43,154.69 0 bottom
R1  10k  [0603]  21.11,14.4 0 top
R2  10k  [0603]  16.92,14.71 90 top
R3  1k  [0603]  9.27,24 0 top
R4  10k  [0603]  12.37,14.58 270 top
R5  10k  [0603]  14.12,14.58 270 top
R6  10k  [0603]  22.1,26.42 180 top
R7  10k  [0603]  25.5,20.57 270 top
R8  10k  [0603]  13.46,19.05 0 top
R9  10k  [0603]  47.02,14.4 0 top
R10  10k  [0603]  42.82,14.71 90 top
R11  10k  [0603]  40.03,14.58 270 top
R12  10k  [0603]  38.28,14.58 270 top
R13  1k  [0603]  35.18,24 0 top
R14  10k  [0603]  48.01,26.42 180 top
R15  10k  [0603]  51.41,20.57 270 top
R16  10k  [0603]  39.37,19.05 0 top
R17  10k  [0603]  72.92,14.4 0 top
R18  10k  [0603]  68.73,14.71 90 top
R19  10k  [0603]  65.94,14.58 270 top
R20  10k  [0603]  64.19,14.58 270 top
R21  1k  [0603]  61.09,24 0 top
R22  10k  [0603]  73.91,26.42 180 top
R23  10k  [0603]  77.32,20.57 270 top
R24  10k  [0603]  65.28,19.05 0 top
R25  10k  [0603]  98.83,14.4 0 top
R26  10k  [0603]  94.64,14.71 90 top
R27  10k  [0603]  91.85,14.58 270 top
R28  10k  [0603]  90.09,14.58 270 top
R29  1k  [0603]  87,24 0 top
R30  10k  [0603]  99.82,26.42 180 top
R31  10k  [0603]  103.23,20.57 270 top
R32  10k  [0603]  91.19,19.05 0 top
R33  10k  [0603]  21.11,40.31 0 top
R34  10k  [0603]  16.92,40.61 90 top
R35  10k  [0603]  14.12,40.49 270 top
R36  10k  [0603]  12.37,40.49 270 top
R37  1k  [0603]  9.27,49.91 0 top
R38  10k  [0603]  22.1,52.32 180 top
R39  10k  [0603]  25.5,46.48 270 top
R40  10k  [0603]  13.46,44.96 0 top
R41  10k  [0603]  47.02,40.31 0 top
R42  10k  [0603]  42.82,40.61 90 top
R43  10k  [0603]  40.03,40.49 270 top
R44  10k  [0603]  38.28,40.49 270 top
R45  1k  [0603]  35.18,49.91 0 top
R46  10k  [0603]  48.01,52.32 180 top
R47  10k  [0603]  51.41,46.48 270 top
R48  10k  [0603]  39.37,44.96 0 top
R49  10k  [0603]  72.92,40.31 0 top
R50  10k  [0603]  68.73,40.61 90 top
R51  10k  [0603]  65.94,40.49 270 top
R52  10k  [0603]  64.19,40.49 270 top
R53  1k  [0603]  61.09,49.91 0 top
R54  10k  [0603]  73.91,52.32 180 top
R55  10k  [0603]  77.32,46.48 270 top
R56  10k  [0603]  65.28,44.96 0 top
R57  10k  [0603]  98.83,40.31 0 top
R58  10k  [0603]  94.64,40.61 90 top
R59  10k  [0603]  91.85,40.49 270 top
R60  10k  [0603]  90.09,40.49 270 top
R61  1k  [0603]  87,49.91 0 top
R62  10k  [0603]  99.82,52.32 180 top
R63  10k  [0603]  103.23,46.48 270 top
R64  10k  [0603]  91.19,44.96 0 top
R65  10k  [0603]  21.11,66.22 0 top
R66  10k  [0603]  16.92,66.52 90 top
R67  10k  [0603]  14.12,66.4 270 top
R68  10k  [0603]  12.37,66.4 270 top
R69  1k  [0603]  9.27,75.82 0 top
R70  10k  [0603]  22.1,78.23 180 top
R71  10k  [0603]  25.5,72.39 270 top
R72  10k  [0603]  13.46,70.87 0 top
R73  10k  [0603]  47.02,66.22 0 top
R74  10k  [0603]  42.82,66.52 90 top
R75  10k  [0603]  40.03,66.4 270 top
R76  10k  [0603]  38.28,66.4 270 top
R77  1k  [0603]  35.18,75.82 0 top
R78  10k  [0603]  48.01,78.23 180 top
R79  10k  [0603]  51.41,72.39 270 top
R80  10k  [0603]  39.37,70.87 0 top
R81  10k  [0603]  72.92,66.22 0 top
R82  10k  [0603]  68.73,66.52 90 top
R83  10k  [0603]  65.94,66.4 270 top
R84  10k  [0603]  64.19,66.4 270 top
R85  1k  [0603]  61.09,75.82 0 top
R86  10k  [0603]  73.91,78.23 180 top
R87  10k  [0603]  77.32,72.39 270 top
R88  10k  [0603]  65.28,70.87 0 top
R89  10k  [0603]  98.83,66.22 0 top
R90  10k  [0603]  94.64,66.52 90 top
R91  10k  [0603]  91.85,66.4 270 top
R92  10k  [0603]  90.09,66.4 270 top
R93  1k  [0603]  87,75.82 0 top
R94  10k  [0603]  99.82,78.23 180 top
R95  10k  [0603]  103.23,72.39 270 top
R96  10k  [0603]  91.19,70.87 0 top
R97  10k  [0603]  21.11,92.13 0 top
R98  10k  [0603]  16.92,92.43 90 top
R99  10k  [0603]  14.12,92.3 270 top
R100  10k  [0603]  12.37,92.3 270 top
R101  1k  [0603]  9.27,101.73 0 top
R102  10k  [0603]  22.1,104.14 180 top
R103  10k  [0603]  25.5,98.3 270 top
R104  10k  [0603]  13.46,96.77 0 top
R105  10k  [0603]  47.02,92.13 0 top
R106  10k  [0603]  42.82,92.43 90 top
R107  10k  [0603]  40.03,92.3 270 top
R108  10k  [0603]  38.28,92.3 270 top
R109  1k  [0603]  35.18,101.73 0 top
R110  10k  [0603]  48.01,104.14 180 top
R111  10k  [0603]  51.41,98.3 270 top
R112  10k  [0603]  39.37,96.77 0 top
R113  10k  [0603]  72.92,92.13 0 top
R114  10k  [0603]  68.73,92.43 90 top
R115  10k  [0603]  65.94,92.3 270 top
R116  10k  [0603]  64.19,92.3 270 top
R117  1k  [0603]  61.09,101.73 0 top
R118  10k  [0603]  73.91,104.14 180 top
R119  10k  [0603]  77.32,98.3 270 top
R120  10k  [0603]  65.28,96.77 0 top
R121  10k  [0603]  98.83,92.13 0 top
R122  10k  [0603]  94.64,92.43 90 top
R123  10k  [0603]  91.85,92.3 270 top
R124  10k  [0603]  90.09,92.3 270 top
R125  1k  [0603]  87,101.73 0 top
R126  10k  [0603]  99.82,104.14 180 top
R127  10k  [0603]  103.23,98.3 270 top
R128  10k  [0603]  91.19,96.77 0 top
R129  10k  [0603]  21.11,118.03 0 top
R130  10k  [0603]  16.92,118.34 90 top
R131  10k  [0603]  14.12,118.21 270 top
R132  10k  [0603]  12.37,118.21 270 top
R133  1k  [0603]  9.27,127.64 0 top
R134  10k  [0603]  22.1,130.05 180 top
R135  10k  [0603]  25.5,124.21 270 top
R136  10k  [0603]  13.46,122.68 0 top
R137  10k  [0603]  47.02,118.03 0 top
R138  10k  [0603]  42.82,118.34 90 top
R139  10k  [0603]  40.03,118.21 270 top
R140  10k  [0603]  38.28,118.21 270 top
R141  1k  [0603]  35.18,127.64 0 top
R142  10k  [0603]  48.01,130.05 180 top
R143  10k  [0603]  51.41,124.21 270 top
R144  10k  [0603]  39.37,122.68 0 top
R145  10k  [0603]  72.92,118.03 0 top
R146  10k  [0603]  68.73,118.34 90 top
R147  10k  [0603]  65.94,118.21 270 top
R148  10k  [0603]  64.19,118.21 270 top
R149  1k  [0603]  61.09,127.64 0 top
R150  10k  [0603]  73.91,130.05 180 top
R151  10k  [0603]  77.32,124.21 270 top
R152  10k  [0603]  65.28,122.68 0 top
R153  10k  [0603]  98.83,118.03 0 top
R154  10k  [0603]  94.64,118.34 90 top
R155  10k  [0603]  91.85,118.21 270 top
R156  10k  [0603]  90.09,118.21 270 top
R157  1k  [0603]  87,127.64 0 top
R158  10k  [0603]  99.82,130.05 180 top
R159  10k  [0603]  103.23,124.21 270 top
R160  10k  [0603]  91.19,122.68 0 top
R161  10k  [0603]  21.11,143.94 0 top
R162  10k  [0603]  16.92,144.25 90 top
R163  10k  [0603]  14.12,144.12 270 top
R164  10k  [0603]  12.37,144.12 270 top
R165  1k  [0603]  9.27,153.54 0 top
R166  10k  [0603]  22.1,155.96 180 top
R167  10k  [0603]  25.5,150.11 270 top
R168  10k  [0603]  13.46,148.59 0 top
R169  10k  [0603]  47.02,143.94 0 top
R170  10k  [0603]  42.82,144.25 90 top
R171  10k  [0603]  40.03,144.12 270 top
R172  10k  [0603]  38.28,144.12 270 top
R173  1k  [0603]  35.18,153.54 0 top
R174  10k  [0603]  48.01,155.96 180 top
R175  10k  [0603]  51.41,150.11 270 top
R176  10k  [0603]  39.37,148.59 0 top
R177  10k  [0603]  72.92,143.94 0 top
R178  10k  [0603]  68.73,144.25 90 top
R179  10k  [0603]  65.94,144.12 270 top
R180  10k  [0603]  64.19,144.12 270 top
R181  1k  [0603]  61.09,153.54 0 top
R182  10k  [0603]  73.91,155.96 180 top
R183  10k  [0603]  77.32,150.11 270 top
R184  10k  [0603]  65.28,148.59 0 top
R185  10k  [0603]  98.83,143.94 0 top
R186  10k  [0603]  94.64,144.25 90 top
R187  10k  [0603]  91.85,144.12 270 top
R188  10k  [0603]  90.09,144.12 270 top
R189  1k  [0603]  87,153.54 0 top
R190  10k  [0603]  99.82,155.96 180 top
R191  10k  [0603]  103.23,150.11 270 top
R192  10k  [0603]  91.19,148.59 0 top
U1  AS3935  [16LD_MLPQ]  20.07,20.83 180 top
U2  AS3935  [16LD_MLPQ]  45.97,20.83 180 top
U3  AS3935  [16LD_MLPQ]  71.88,20.83 180 top
U4  AS3935  [16LD_MLPQ]  97.79,20.83 180 top
U5  AS3935  [16LD_MLPQ]  20.07,46.74 180 top
U6  AS3935  [16LD_MLPQ]  45.97,46.74 180 top
U7  AS3935  [16LD_MLPQ]  71.88,46.74 180 top
U8  AS3935  [16LD_MLPQ]  97.79,46.74 180 top
U9  AS3935  [16LD_MLPQ]  20.07,72.64 180 top
U10  AS3935  [16LD_MLPQ]  45.97,72.64 180 top
U11  AS3935  [16LD_MLPQ]  71.88,72.64 180 top
U12  AS3935  [16LD_MLPQ]  97.79,72.64 180 top
U13  AS3935  [16LD_MLPQ]  20.07,98.55 180 top
U14  AS3935  [16LD_MLPQ]  45.97,98.55 180 top
U15  AS3935  [16LD_MLPQ]  71.88,98.55 180 top
U16  AS3935  [16LD_MLPQ]  97.79,98.55 180 top
U17  AS3935  [16LD_MLPQ]  20.07,124.46 180 top
U18  AS3935  [16LD_MLPQ]  45.97,124.46 180 top
U19  AS3935  [16LD_MLPQ]  71.88,124.46 180 top
U20  AS3935  [16LD_MLPQ]  97.79,124.46 180 top
U21  AS3935  [16LD_MLPQ]  20.07,150.37 180 top
U22  AS3935  [16LD_MLPQ]  45.97,150.37 180 top
U23  AS3935  [16LD_MLPQ]  71.88,150.37 180 top
U24  AS3935  [16LD_MLPQ]  97.79,150.37 180 top
U$1  [LED0]  11.57,23.59 0 bottom
U$2  [GND-03]  11.96,12.7 270 bottom
U$3  [SPI1]  23.88,13.97 0 top
U$4  [3V3-03]  14.53,12.45 270 bottom
U$5  [#CS0]  19.58,11.81 270 bottom
U$6  [AS39350]  24.77,24 0 bottom
U$7  [LIGHTNING0]  25.91,22.1 0 bottom
U$8  [SCK-(]-03]  22.15,11.91 270 bottom
U$9  [MISO-(]-03]  24.64,12.5 270 bottom
U$10  [GND-03]  11.96,12.7 270 top
U$11  [MOSI-(]-03]  27.23,12.52 270 bottom
U$12  [MISO-(]-03]  24.64,12.5 270 top
U$13  [INT0]  16.99,11.71 270 top
U$14  [INT0]  16.99,11.71 270 bottom
U$15  [SPI1]  27.94,13.97 0 bottom
U$16  [CS0]  24.08,26.37 0 bottom
U$17  [I#C_EN0]  22.23,28.55 0 bottom
U$18  [3V3-03]  14.53,12.45 270 top
U$19  [SI1]  18.03,26.34 0 bottom
U$20  [GND-03]  37.87,12.7 270 top
U$21  [MISO-(]-03]  50.55,12.5 270 top
U$22  [MOSI-(]-03]  27.23,12.52 270 top
U$23  [SCK-(]-03]  22.15,11.91 270 top
U$24  [3V3-03]  40.44,12.45 270 top
U$25  [PWR-()-03]  33.27,26.67 0 top
U$26  [ADR-()-04]  40.72,16.03 0 bottom
U$27  [I#C_PU0]  47.02,16 0 bottom
U$28  [10]  36.75,13.94 0 bottom
U$29  [00]  42.75,14 0 bottom
U$30  [#CS0]  19.58,11.81 270 top
U$31  [AS39350]  50.67,24 0 bottom
U$32  [PWR-()-03]  7.37,26.67 0 top
U$33  [ADR-()-04]  14.81,16.03 0 bottom
U$34  [I#C_PU0]  21.11,16 0 bottom
U$35  [LIGHTNING0]  51.82,22.1 0 bottom
U$36  [10]  10.85,13.94 0 bottom
U$37  [00]  16.84,14 0 bottom
U$38  [DETECTOR0]  51.56,20.07 0 bottom
U$39  [DETECTOR0]  25.65,20.07 0 bottom
U$40  [##0]  17.65,30.61 0 top
U$41  [##0]  43.56,30.61 0 top
U$42  [MOSI-(]-03]  53.14,12.52 270 top
U$43  [SCK-(]-03]  48.06,11.91 270 top
U$44  [#CS0]  45.49,11.81 270 top
U$45  [LED0]  37.48,23.59 0 bottom
U$46  [SPI1]  49.78,13.97 0 top
U$47  [GND-03]  37.87,12.7 270 bottom
U$48  [3V3-03]  40.44,12.45 270 bottom
U$49  [#CS0]  45.49,11.81 270 bottom
U$50  [SCK-(]-03]  48.06,11.91 270 bottom
U$51  [MISO-(]-03]  50.55,12.5 270 bottom
U$52  [MOSI-(]-03]  53.14,12.52 270 bottom
U$53  [SPI1]  53.85,13.97 0 bottom
U$54  [I#C_EN0]  48.13,28.55 0 bottom
U$55  [CS0]  49.99,26.37 0 bottom
U$56  [SI1]  43.94,26.34 0 bottom
U$57  [INT0]  42.9,11.71 270 top
U$58  [INT0]  42.9,11.71 270 bottom
U$59  [GND-03]  63.78,12.7 270 top
U$60  [MISO-(]-03]  76.45,12.5 270 top
U$61  [3V3-03]  66.34,12.45 270 top
U$62  [PWR-()-03]  59.18,26.67 0 top
U$63  [ADR-()-04]  66.62,16.03 0 bottom
U$64  [I#C_PU0]  72.92,16 0 bottom
U$65  [10]  62.66,13.94 0 bottom
U$66  [00]  68.66,14 0 bottom
U$67  [AS39350]  76.58,24 0 bottom
U$68  [LIGHTNING0]  77.72,22.1 0 bottom
U$69  [DETECTOR0]  77.47,20.07 0 bottom
U$70  [##0]  69.47,30.61 0 top
U$71  [MOSI-(]-03]  79.04,12.52 270 top
U$72  [SCK-(]-03]  73.96,11.91 270 top
U$73  [#CS0]  71.4,11.81 270 top
U$74  [LED0]  63.39,23.59 0 bottom
U$75  [SPI1]  75.69,13.97 0 top
U$76  [GND-03]  63.78,12.7 270 bottom
U$77  [3V3-03]  66.34,12.45 270 bottom
U$78  [#CS0]  71.4,11.81 270 bottom
U$79  [SCK-(]-03]  73.96,11.91 270 bottom
U$80  [MISO-(]-03]  76.45,12.5 270 bottom
U$81  [MOSI-(]-03]  79.04,12.52 270 bottom
U$82  [SPI1]  79.76,13.97 0 bottom
U$83  [I#C_EN0]  74.04,28.55 0 bottom
U$84  [CS0]  75.9,26.37 0 bottom
U$85  [SI1]  69.85,26.34 0 bottom
U$86  [INT0]  68.81,11.71 270 top
U$87  [INT0]  68.81,11.71 270 bottom
U$88  [GND-03]  89.69,12.7 270 top
U$89  [MISO-(]-03]  102.36,12.5 270 top
U$90  [3V3-03]  92.25,12.45 270 top
U$91  [PWR-()-03]  85.09,26.67 0 top
U$92  [ADR-()-04]  92.53,16.03 0 bottom
U$93  [I#C_PU0]  98.83,16 0 bottom
U$94  [10]  88.57,13.94 0 bottom
U$95  [00]  94.56,14 0 bottom
U$96  [AS39350]  102.49,24 0 bottom
U$97  [LIGHTNING0]  103.63,22.1 0 bottom
U$98  [DETECTOR0]  103.38,20.07 0 bottom
U$99  [##0]  95.38,30.61 0 top
U$100  [MOSI-(]-03]  104.95,12.52 270 top
U$101  [SCK-(]-03]  99.87,11.91 270 top
U$102  [#CS0]  97.31,11.81 270 top
U$103  [LED0]  89.3,23.59 0 bottom
U$104  [SPI1]  101.6,13.97 0 top
U$105  [GND-03]  89.69,12.7 270 bottom
U$106  [3V3-03]  92.25,12.45 270 bottom
U$107  [#CS0]  97.31,11.81 270 bottom
U$108  [SCK-(]-03]  99.87,11.91 270 bottom
U$109  [MISO-(]-03]  102.36,12.5 270 bottom
U$110  [MOSI-(]-03]  104.95,12.52 270 bottom
U$111  [SPI1]  105.66,13.97 0 bottom
U$112  [I#C_EN0]  99.95,28.55 0 bottom
U$113  [CS0]  101.8,26.37 0 bottom
U$114  [SI1]  95.76,26.34 0 bottom
U$115  [INT0]  94.72,11.71 270 top
U$116  [INT0]  94.72,11.71 270 bottom
U$117  [GND-03]  11.96,38.61 270 top
U$118  [MISO-(]-03]  24.64,38.4 270 top
U$119  [3V3-03]  14.53,38.35 270 top
U$120  [PWR-()-03]  7.37,52.58 0 top
U$121  [ADR-()-04]  14.81,41.94 0 bottom
U$122  [I#C_PU0]  21.11,41.91 0 bottom
U$123  [10]  10.85,39.85 0 bottom
U$124  [00]  16.84,39.9 0 bottom
U$125  [AS39350]  24.77,49.91 0 bottom
U$126  [LIGHTNING0]  25.91,48.01 0 bottom
U$127  [DETECTOR0]  25.65,45.97 0 bottom
U$128  [##0]  17.65,56.51 0 top
U$129  [MOSI-(]-03]  27.23,38.43 270 top
U$130  [SCK-(]-03]  22.15,37.82 270 top
U$131  [#CS0]  19.58,37.72 270 top
U$132  [LED0]  11.57,49.49 0 bottom
U$133  [SPI1]  23.88,39.88 0 top
U$134  [GND-03]  11.96,38.61 270 bottom
U$135  [3V3-03]  14.53,38.35 270 bottom
U$136  [#CS0]  19.58,37.72 270 bottom
U$137  [SCK-(]-03]  22.15,37.82 270 bottom
U$138  [MISO-(]-03]  24.64,38.4 270 bottom
U$139  [MOSI-(]-03]  27.23,38.43 270 bottom
U$140  [SPI1]  27.94,39.88 0 bottom
U$141  [I#C_EN0]  22.23,54.46 0 bottom
U$142  [CS0]  24.08,52.27 0 bottom
U$143  [SI1]  18.03,52.25 0 bottom
U$144  [INT0]  16.99,37.62 270 top
U$145  [INT0]  16.99,37.62 270 bottom
U$146  [GND-03]  37.87,38.61 270 top
U$147  [MISO-(]-03]  50.55,38.4 270 top
U$148  [3V3-03]  40.44,38.35 270 top
U$149  [PWR-()-03]  33.27,52.58 0 top
U$150  [ADR-()-04]  40.72,41.94 0 bottom
U$151  [I#C_PU0]  47.02,41.91 0 bottom
U$152  [10]  36.75,39.85 0 bottom
U$153  [00]  42.75,39.9 0 bottom
U$154  [AS39350]  50.67,49.91 0 bottom
U$155  [LIGHTNING0]  51.82,48.01 0 bottom
U$156  [DETECTOR0]  51.56,45.97 0 bottom
U$157  [##0]  43.56,56.51 0 top
U$158  [MOSI-(]-03]  53.14,38.43 270 top
U$159  [SCK-(]-03]  48.06,37.82 270 top
U$160  [#CS0]  45.49,37.72 270 top
U$161  [LED0]  37.48,49.49 0 bottom
U$162  [SPI1]  49.78,39.88 0 top
U$163  [GND-03]  37.87,38.61 270 bottom
U$164  [3V3-03]  40.44,38.35 270 bottom
U$165  [#CS0]  45.49,37.72 270 bottom
U$166  [SCK-(]-03]  48.06,37.82 270 bottom
U$167  [MISO-(]-03]  50.55,38.4 270 bottom
U$168  [MOSI-(]-03]  53.14,38.43 270 bottom
U$169  [SPI1]  53.85,39.88 0 bottom
U$170  [I#C_EN0]  48.13,54.46 0 bottom
U$171  [CS0]  49.99,52.27 0 bottom
U$172  [SI1]  43.94,52.25 0 bottom
U$173  [INT0]  42.9,37.62 270 top
U$174  [INT0]  42.9,37.62 270 bottom
U$175  [GND-03]  63.78,38.61 270 top
U$176  [MISO-(]-03]  76.45,38.4 270 top
U$177  [3V3-03]  66.34,38.35 270 top
U$178  [PWR-()-03]  59.18,52.58 0 top
U$179  [ADR-()-04]  66.62,41.94 0 bottom
U$180  [I#C_PU0]  72.92,41.91 0 bottom
U$181  [10]  62.66,39.85 0 bottom
U$182  [00]  68.66,39.9 0 bottom
U$183  [AS39350]  76.58,49.91 0 bottom
U$184  [LIGHTNING0]  77.72,48.01 0 bottom
U$185  [DETECTOR0]  77.47,45.97 0 bottom
U$186  [##0]  69.47,56.51 0 top
U$187  [MOSI-(]-03]  79.04,38.43 270 top
U$188  [SCK-(]-03]  73.96,37.82 270 top
U$189  [#CS0]  71.4,37.72 270 top
U$190  [LED0]  63.39,49.49 0 bottom
U$191  [SPI1]  75.69,39.88 0 top
U$192  [GND-03]  63.78,38.61 270 bottom
U$193  [3V3-03]  66.34,38.35 270 bottom
U$194  [#CS0]  71.4,37.72 270 bottom
U$195  [SCK-(]-03]  73.96,37.82 270 bottom
U$196  [MISO-(]-03]  76.45,38.4 270 bottom
U$197  [MOSI-(]-03]  79.04,38.43 270 bottom
U$198  [SPI1]  79.76,39.88 0 bottom
U$199  [I#C_EN0]  74.04,54.46 0 bottom
U$200  [CS0]  75.9,52.27 0 bottom
U$201  [SI1]  69.85,52.25 0 bottom
U$202  [INT0]  68.81,37.62 270 top
U$203  [INT0]  68.81,37.62 270 bottom
U$204  [GND-03]  89.69,38.61 270 top
U$205  [MISO-(]-03]  102.36,38.4 270 top
U$206  [3V3-03]  92.25,38.35 270 top
U$207  [PWR-()-03]  85.09,52.58 0 top
U$208  [ADR-()-04]  92.53,41.94 0 bottom
U$209  [I#C_PU0]  98.83,41.91 0 bottom
U$210  [10]  88.57,39.85 0 bottom
U$211  [00]  94.56,39.9 0 bottom
U$212  [AS39350]  102.49,49.91 0 bottom
U$213  [LIGHTNING0]  103.63,48.01 0 bottom
U$214  [DETECTOR0]  103.38,45.97 0 bottom
U$215  [##0]  95.38,56.51 0 top
U$216  [MOSI-(]-03]  104.95,38.43 270 top
U$217  [SCK-(]-03]  99.87,37.82 270 top
U$218  [#CS0]  97.31,37.72 270 top
U$219  [LED0]  89.3,49.49 0 bottom
U$220  [SPI1]  101.6,39.88 0 top
U$221  [GND-03]  89.69,38.61 270 bottom
U$222  [3V3-03]  92.25,38.35 270 bottom
U$223  [#CS0]  97.31,37.72 270 bottom
U$224  [SCK-(]-03]  99.87,37.82 270 bottom
U$225  [MISO-(]-03]  102.36,38.4 270 bottom
U$226  [MOSI-(]-03]  104.95,38.43 270 bottom
U$227  [SPI1]  105.66,39.88 0 bottom
U$228  [I#C_EN0]  99.95,54.46 0 bottom
U$229  [CS0]  101.8,52.27 0 bottom
U$230  [SI1]  95.76,52.25 0 bottom
U$231  [INT0]  94.72,37.62 270 top
U$232  [INT0]  94.72,37.62 270 bottom
U$233  [GND-03]  11.96,64.52 270 top
U$234  [MISO-(]-03]  24.64,64.31 270 top
U$235  [3V3-03]  14.53,64.26 270 top
U$236  [PWR-()-03]  7.37,78.49 0 top
U$237  [ADR-()-04]  14.81,67.84 0 bottom
U$238  [I#C_PU0]  21.11,67.82 0 bottom
U$239  [10]  10.85,65.76 0 bottom
U$240  [00]  16.84,65.81 0 bottom
U$241  [AS39350]  24.77,75.82 0 bottom
U$242  [LIGHTNING0]  25.91,73.91 0 bottom
U$243  [DETECTOR0]  25.65,71.88 0 bottom
U$244  [##0]  17.65,82.42 0 top
U$245  [MOSI-(]-03]  27.23,64.34 270 top
U$246  [SCK-(]-03]  22.15,63.73 270 top
U$247  [#CS0]  19.58,63.63 270 top
U$248  [LED0]  11.57,75.4 0 bottom
U$249  [SPI1]  23.88,65.79 0 top
U$250  [GND-03]  11.96,64.52 270 bottom
U$251  [3V3-03]  14.53,64.26 270 bottom
U$252  [#CS0]  19.58,63.63 270 bottom
U$253  [SCK-(]-03]  22.15,63.73 270 bottom
U$254  [MISO-(]-03]  24.64,64.31 270 bottom
U$255  [MOSI-(]-03]  27.23,64.34 270 bottom
U$256  [SPI1]  27.94,65.79 0 bottom
U$257  [I#C_EN0]  22.23,80.37 0 bottom
U$258  [CS0]  24.08,78.18 0 bottom
U$259  [SI1]  18.03,78.16 0 bottom
U$260  [INT0]  16.99,63.53 270 top
U$261  [INT0]  16.99,63.53 270 bottom
U$262  [GND-03]  37.87,64.52 270 top
U$263  [MISO-(]-03]  50.55,64.31 270 top
U$264  [3V3-03]  40.44,64.26 270 top
U$265  [PWR-()-03]  33.27,78.49 0 top
U$266  [ADR-()-04]  40.72,67.84 0 bottom
U$267  [I#C_PU0]  47.02,67.82 0 bottom
U$268  [10]  36.75,65.76 0 bottom
U$269  [00]  42.75,65.81 0 bottom
U$270  [AS39350]  50.67,75.82 0 bottom
U$271  [LIGHTNING0]  51.82,73.91 0 bottom
U$272  [DETECTOR0]  51.56,71.88 0 bottom
U$273  [##0]  43.56,82.42 0 top
U$274  [MOSI-(]-03]  53.14,64.34 270 top
U$275  [SCK-(]-03]  48.06,63.73 270 top
U$276  [#CS0]  45.49,63.63 270 top
U$277  [LED0]  37.48,75.4 0 bottom
U$278  [SPI1]  49.78,65.79 0 top
U$279  [GND-03]  37.87,64.52 270 bottom
U$280  [3V3-03]  40.44,64.26 270 bottom
U$281  [#CS0]  45.49,63.63 270 bottom
U$282  [SCK-(]-03]  48.06,63.73 270 bottom
U$283  [MISO-(]-03]  50.55,64.31 270 bottom
U$284  [MOSI-(]-03]  53.14,64.34 270 bottom
U$285  [SPI1]  53.85,65.79 0 bottom
U$286  [I#C_EN0]  48.13,80.37 0 bottom
U$287  [CS0]  49.99,78.18 0 bottom
U$288  [SI1]  43.94,78.16 0 bottom
U$289  [INT0]  42.9,63.53 270 top
U$290  [INT0]  42.9,63.53 270 bottom
U$291  [GND-03]  63.78,64.52 270 top
U$292  [MISO-(]-03]  76.45,64.31 270 top
U$293  [3V3-03]  66.34,64.26 270 top
U$294  [PWR-()-03]  59.18,78.49 0 top
U$295  [ADR-()-04]  66.62,67.84 0 bottom
U$296  [I#C_PU0]  72.92,67.82 0 bottom
U$297  [10]  62.66,65.76 0 bottom
U$298  [00]  68.66,65.81 0 bottom
U$299  [AS39350]  76.58,75.82 0 bottom
U$300  [LIGHTNING0]  77.72,73.91 0 bottom
U$301  [DETECTOR0]  77.47,71.88 0 bottom
U$302  [##0]  69.47,82.42 0 top
U$303  [MOSI-(]-03]  79.04,64.34 270 top
U$304  [SCK-(]-03]  73.96,63.73 270 top
U$305  [#CS0]  71.4,63.63 270 top
U$306  [LED0]  63.39,75.4 0 bottom
U$307  [SPI1]  75.69,65.79 0 top
U$308  [GND-03]  63.78,64.52 270 bottom
U$309  [3V3-03]  66.34,64.26 270 bottom
U$310  [#CS0]  71.4,63.63 270 bottom
U$311  [SCK-(]-03]  73.96,63.73 270 bottom
U$312  [MISO-(]-03]  76.45,64.31 270 bottom
U$313  [MOSI-(]-03]  79.04,64.34 270 bottom
U$314  [SPI1]  79.76,65.79 0 bottom
U$315  [I#C_EN0]  74.04,80.37 0 bottom
U$316  [CS0]  75.9,78.18 0 bottom
U$317  [SI1]  69.85,78.16 0 bottom
U$318  [INT0]  68.81,63.53 270 top
U$319  [INT0]  68.81,63.53 270 bottom
U$320  [GND-03]  89.69,64.52 270 top
U$321  [MISO-(]-03]  102.36,64.31 270 top
U$322  [3V3-03]  92.25,64.26 270 top
U$323  [PWR-()-03]  85.09,78.49 0 top
U$324  [ADR-()-04]  92.53,67.84 0 bottom
U$325  [I#C_PU0]  98.83,67.82 0 bottom
U$326  [10]  88.57,65.76 0 bottom
U$327  [00]  94.56,65.81 0 bottom
U$328  [AS39350]  102.49,75.82 0 bottom
U$329  [LIGHTNING0]  103.63,73.91 0 bottom
U$330  [DETECTOR0]  103.38,71.88 0 bottom
U$331  [##0]  95.38,82.42 0 top
U$332  [MOSI-(]-03]  104.95,64.34 270 top
U$333  [SCK-(]-03]  99.87,63.73 270 top
U$334  [#CS0]  97.31,63.63 270 top
U$335  [LED0]  89.3,75.4 0 bottom
U$336  [SPI1]  101.6,65.79 0 top
U$337  [GND-03]  89.69,64.52 270 bottom
U$338  [3V3-03]  92.25,64.26 270 bottom
U$339  [#CS0]  97.31,63.63 270 bottom